# Allegro board HDMI-RK628 GSV2011-A01.brd
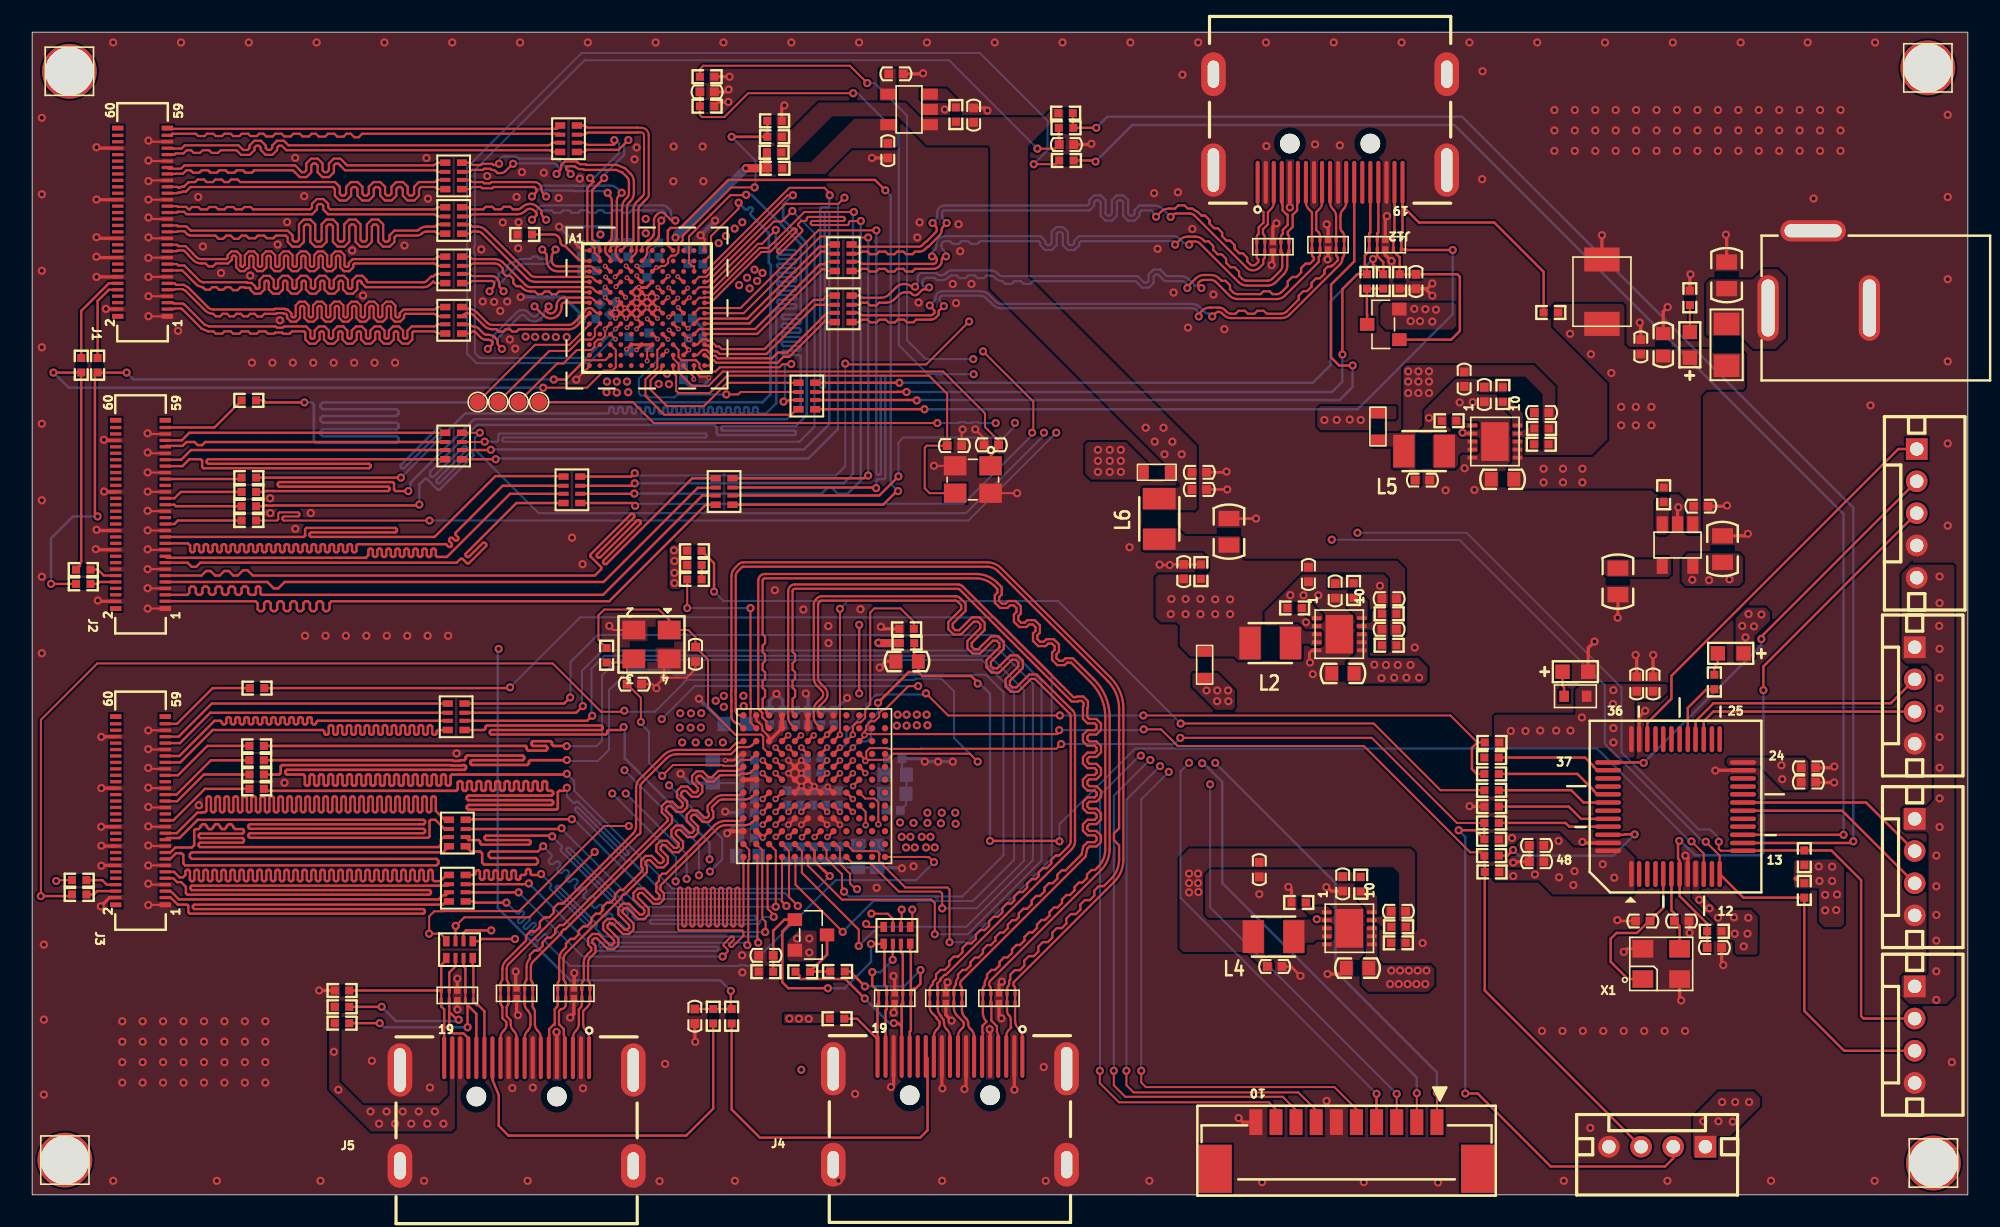
[diagram p0: board, top side]
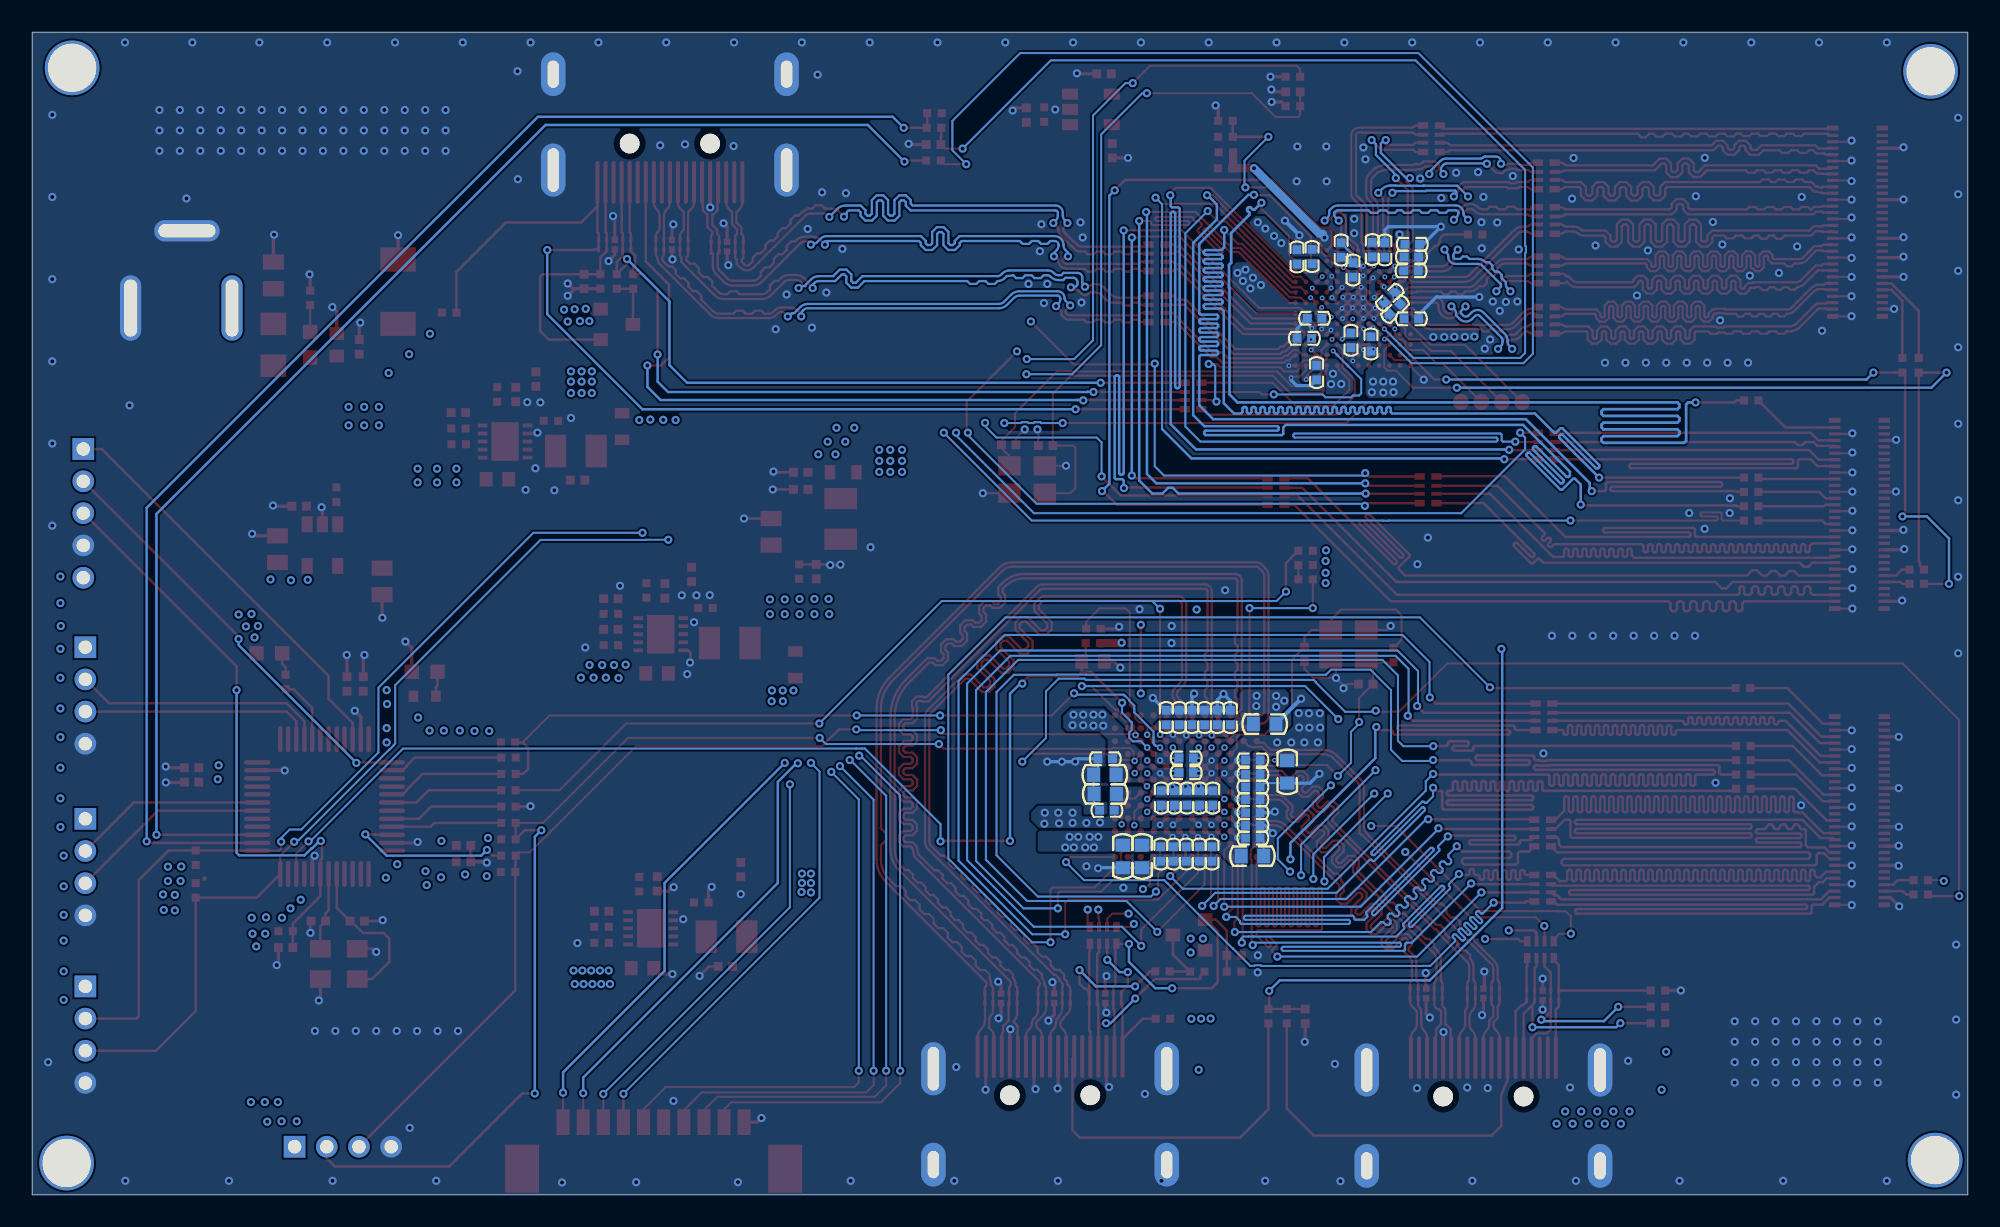
[diagram p1: board, bottom side, seen from below]

Outline 120.27 x 72.26 mm; copper layers: TOP, GND, POWER, BOTTOM. Coordinates in mm from the lower left corner of the outline.
Outline path: 0,72.26 0,0 120.27,0 120.27,72.26 0,72.26

## Design rules (mm)
net group BT1120/LCDC_D0: nets BT1120/D0 BT1120/LCDC_D0
net group BT1120/LCDC_D1: nets BT1120/D1 BT1120/LCDC_D1
net group BT1120/LCDC_D2: nets BT1120/D2 BT1120/LCDC_D2
net group BT1120/LCDC_D3: nets BT1120/D3 BT1120/LCDC_D3
net group BT1120/LCDC_D4: nets BT1120/D4 BT1120/LCDC_D4
net group BT1120/LCDC_D5: nets BT1120/D5 BT1120/LCDC_D5
net group BT1120/LCDC_D6: nets BT1120/D6 BT1120/LCDC_D6
net group BT1120/LCDC_D7: nets BT1120/D7 BT1120/LCDC_D7
net group BT1120/LCDC_D8: nets BT1120/D8 BT1120/LCDC_D8
net group BT1120/LCDC_D9: nets BT1120/D9 BT1120/LCDC_D9
net group BT1120/LCDC_D10: nets BT1120/D10 BT1120/LCDC_D10
net group BT1120/LCDC_D11: nets BT1120/D11 BT1120/LCDC_D11
net group BT1120/LCDC_D12: nets BT1120/D12 BT1120/LCDC_D12
net group BT1120/LCDC_D13: nets BT1120/D13 BT1120/LCDC_D13
net group BT1120/LCDC_D14: nets BT1120/D14 BT1120/LCDC_D14
net group BT1120/LCDC_D15: nets BT1120/D15 BT1120/LCDC_D15
net group BT1120/LCDC_DCLK: nets BT1120/DCLK BT1120/LCDC_DCLK
net group BT1120_D0: nets BT1120_D0 BT1120D0
net group BT1120_D1: nets BT1120_D1 BT1120D1
net group BT1120_D2: nets BT1120_D2 BT1120D2
net group BT1120_D3: nets BT1120_D3 BT1120D3
net group BT1120_D4: nets BT1120_D4 BT1120D4
net group BT1120_D5: nets BT1120_D5 BT1120D5
net group BT1120_D6: nets BT1120_D6 BT1120D6
net group BT1120_D7: nets BT1120_D7 BT1120D7
net group BT1120_D8: nets BT1120_D8 BT1120D8
net group BT1120_D9: nets BT1120_D9 BT1120D9
net group BT1120_D10: nets BT1120_D10 BT1120D10
net group BT1120_D11: nets BT1120_D11 BT1120D11
net group BT1120_D12: nets BT1120_D12 BT1120D12
net group BT1120_D13: nets BT1120_D13 BT1120D13
net group BT1120_D14: nets BT1120_D14 BT1120D14
net group BT1120_D15: nets BT1120_D15 BT1120D15
net group BT1120_DCLK: nets BT1120_DCLK BT1120DCLK
net group HDMIRX_CLKN: nets HDMI_RXCLKN HDMIRX_CLKN
net group HDMIRX_CLKP: nets HDMI_RXCLKP HDMIRX_CLKP
net group HDMIRXD0N: nets HDMIRX_D0N HDMIRXD0N
net group HDMIRXD0P: nets HDMIRX_D0P HDMIRXD0P
net group HDMIRXD1N: nets HDMIRX_D1N HDMIRXD1N
net group HDMIRXD1P: nets HDMIRX_D1P HDMIRXD1P
net group HDMIRXD2N: nets HDMIRX_D2N HDMIRXD2N
net group HDMIRXD2P: nets HDMIRX_D2P HDMIRXD2P
net group RK628D_G0/L1/M1_D0N: nets M1_D0N RK628D_G0/L1/M1_D0N
net group RK628D_G0/L1/M1_D0P: nets M1_D0P RK628D_G0/L1/M1_D0P
net group RK628D_G1/L1/M1_D1N: nets M1_D1N RK628D_G1/L1/M1_D1N
net group RK628D_G1/L1/M1_D1P: nets M1_D1P RK628D_G1/L1/M1_D1P
net group RK628D_G2/L1/M1_D2N: nets M1_D2N RK628D_G2/L1/M1_D2N
net group RK628D_G2/L1/M1_D2P: nets M1_D2P RK628D_G2/L1/M1_D2P
net group RK628D_G3/L1/M1_D3N: nets M1_D3N RK628D_G3/L1/M1_D3N
net group RK628D_G3/L1/M1_D3P: nets M1_D3P RK628D_G3/L1/M1_D3P
net group RK628D_G4/L2/M2_D0N: nets M2_D0N RK628D_G4/L2/M2_D0N
net group RK628D_G4/L2/M2_D0P: nets M2_D0P RK628D_G4/L2/M2_D0P
net group RK628D_G5/L2/M2_D1N: nets M2_D1N RK628D_G5/L2/M2_D1N
net group RK628D_G5/L2/M2_D1P: nets M2_D1P RK628D_G5/L2/M2_D1P
net group RK628D_G6/L2/M2_D2N: nets M2_D2N RK628D_G6/L2/M2_D2N
net group RK628D_G6/L2/M2_D2P: nets M2_D2P RK628D_G6/L2/M2_D2P
net group RK628D_G7/L2/M2_D3N: nets M2_D3N RK628D_G7/L2/M2_D3N
net group RK628D_G7/L2/M2_D3P: nets M2_D3P RK628D_G7/L2/M2_D3P
net group RK628D_L1/M1_CLKN: nets M1_CLKN RK628D_L1/M1_CLKN
net group RK628D_L1/M1_CLKP: nets M1_CLKP RK628D_L1/M1_CLKP
net group RK628D_L2/M2_CLKN: nets M2_CLKN RK628D_L2/M2_CLKN
net group RK628D_L2/M2_CLKP: nets M2_CLKP RK628D_L2/M2_CLKP
net group RX: nets RXA0_N RXA0_P RXA1_N RXA1_P RXA2_N RXA2_P RXAC_N RXAC_P
net group TX: nets TXA0_N TXA0_P TXA1_N TXA1_P TXA2_N TXA2_P TXAC_N TXAC_P

## Placement (name value [footprint] x y rotation side)
C1  10uF  [C0402]  45.59 14.88 180 top
C2  18pF  [C0402]  37.41 31.74 0 top
C3  18pF  [C0402]  41.21 33.6 270 top
C4  4.7uF  [C0603]  54.36 33.15 180 top
C5  47uF  [C0805]  105.28 57.15 90 top
C6  10uF  [C0603]  101.35 52.83 90 top
C7  0.1UF  [C0402]  99.95 52.7 90 top
C8  10uF  [C0603]  51.31 21.03 270 bottom
C9  0.1uF  [C0402]  47.75 21.18 270 bottom
C10  0.1uF  [C0402]  46.96 21.18 270 bottom
C11  0.1uF  [C0402]  48.56 21.18 270 bottom
C12  0.1uF  [C0402]  49.35 21.18 90 bottom
C13  0.1uF  [C0402]  50.14 21.18 270 bottom
C14  10uF  [C0603]  44.45 21.06 180 bottom
C15  0.1uF  [C0402]  48.56 27.15 180 bottom
C16  0.1uF  [C0402]  49.81 29.67 90 bottom
C17  10uF  [C0603]  43.69 29.26 180 bottom
C18  0.1uF  [C0402]  44.42 23.75 180 bottom
C19  0.1uF  [C0402]  44.42 22.96 180 bottom
C20  0.1uF  [C0402]  44.42 22.17 180 bottom
C21  0.1uF  [C0402]  45.82 29.67 90 bottom
C22  10uF  [C0603]  52.5 21.03 270 bottom
C23  0.1uF  [C0402]  49 29.67 90 bottom
C24  0.1uF  [C0402]  48.21 29.67 90 bottom
C25  0.1uF  [C0402]  47.42 29.67 90 bottom
C26  0.1uF  [C0402]  46.63 29.67 90 bottom
C27  10uF  [C0603]  42.29 26.29 270 bottom
C28  0.1uF  [C0402]  44.42 24.56 180 bottom
C29  0.1uF  [C0402]  44.42 25.35 180 bottom
C30  10uF  [C0603]  53.62 26.11 0 bottom
C31  0.1uF  [C0402]  53.59 27.1 0 bottom
C32  0.1uF  [C0402]  48.56 26.24 180 bottom
C33  0.1uF  [C0402]  44.42 27.03 180 bottom
C34  0.1uF  [C0402]  44.42 26.14 180 bottom
C35  10uF  [C0603]  53.59 24.92 0 bottom
C36  1uF  [C0402]  53.49 23.9 0 bottom
C37  1uF  [C0402]  50.11 24.66 90 bottom
C38  0.1uF  [C0402]  49.3 24.66 90 bottom
C39  0.1uF  [C0402]  48.51 24.66 90 bottom
C40  0.1uF  [C0402]  47.73 24.66 90 bottom
C41  0.1uF  [C0402]  46.91 24.66 90 bottom
C42  22uF  [C0603]  81.44 32.41 180 top
C43  22pF  [C0402]  84.31 35.15 180 top
C44  4000pF  [C0402]  80.96 37.54 270 top
C45  22uF  [C0402]  84.31 37.05 0 top
C53  22pF  [C0402]  84.89 17.62 180 top
C54  4000pF  [C0402]  81.43 19.33 270 top
C55  22uF  [C0402]  77.2 14.19 180 top
C56  22uF  [C0603]  82.35 14.09 180 top
C57  1uF  [C0402]  103.68 42.8 0 top
C58  0.01uF  [C0805]  98.53 38.13 270 top
C59  1uF  [C0805]  105.03 40.13 90 top
C60  100NF  [C0402]  110.36 25.65 180 top
C61  100NF  [C0402]  110.36 26.54 180 top
C62  100NF  [C0402]  93.47 20.7 0 top
C63  100NF  [C0402]  93.47 21.72 0 top
C64  100NF  [C0402]  99.69 31.75 270 top
C65  100NF  [C0402]  100.71 31.75 270 top
C66  100NF  [C0402]  104.52 15.37 180 top
C67  18PF  [C0402]  100.08 17.02 0 top
C68  18PF  [C0402]  102.49 17.02 180 top
C69  100nF  [C0402]  64.26 65.28 180 top
C70  12pF  [C0402]  59.6 46.61 180 top
C71  12pF  [C0402]  57.3 46.57 180 top
C72  100nF  [C0402]  41.94 68.55 0 top
C73  100nF  [C0402]  40.74 58.32 90 bottom
C74  100nF  [C0402]  41.68 58.29 90 bottom
C75  100nF  [C0402]  37.08 52.88 270 bottom
C76  100nF  [C0402]  36.22 58.72 90 bottom
C77  100nF  [C0402]  40.46 51.1 270 bottom
C78  100nF  [C0402]  35.59 55.04 315 bottom
C79  100nF  [C0402]  38.33 53.11 270 bottom
C80  100nF  [C0402]  35.92 55.78 315 bottom
C81  1uF  [C0402]  40.59 54.48 0 bottom
C82  100nF  [C0402]  41.22 53.24 0 bottom
C83  1uF  [C0402]  34.59 57.43 180 bottom
C84  100nF  [C0402]  34.57 58.29 180 bottom
C85  100nF  [C0402]  34.52 59.08 180 bottom
C86  100nF  [C0402]  37.01 58.75 90 bottom
C87  1uF  [C0402]  34.57 54.45 180 bottom
C88  100nF  [C0402]  38.2 57.48 90 bottom
C89  1uF  [C0402]  38.94 58.72 90 bottom
C90  10uF  [C0805]  74.36 41.21 90 top
C91  100nF  [C0402]  71.55 38.73 90 top
C92  4.7uF  [C0402]  72.52 43.84 0 top
C93  100nF  [C0402]  72.52 44.91 0 top
C94  22pF  [C0402]  93.79 48.62 180 top
C95  4000pF  [C0402]  90.22 49.74 270 top
C96  22uF  [C0402]  86.38 44.42 180 top
C97  22uF  [C0603]  91.36 44.47 180 top
C98  1uF  [C0402]  58.5 67.11 90 top
C99  1uF  [C0402]  53.16 64.9 270 top
C100  0.01uF  [C0402]  53.67 69.67 0 top
C101  10uF  [C0402]  85.98 56.77 270 top
C102  22uF  [C0402]  79.3 38.56 90 top
C103  22uF  [C0402]  76.24 20.21 90 top
C104  22uF  [C0402]  88.98 50.7 90 top
D1  BAT54C  [SOT23]  48.39 16.15 270 top
D2  SMBJ28CA  [DO-214AA]  97.54 56.13 270 top
D5  BAT54C  [SOT23]  83.95 54.1 90 top
ESD1  Rclamp0524  [DFN2510]  60.07 12.22 180 top
ESD2  Rclamp0524  [DFN2510]  33.65 12.52 180 top
ESD3  Rclamp0524  [DFN2510]  56.77 12.22 180 top
ESD4  Rclamp0524  [DFN2510]  30.1 12.52 180 top
ESD5  AVLC18S02015  [C0402]  41.17 11.1 270 top
ESD6  Rclamp0524  [DFN2510]  53.59 12.22 180 top
ESD7  Rclamp0524  [DFN2510]  26.42 12.4 180 top
ESD8  Rclamp0524  [DFN2510]  77.09 58.93 0 top
ESD9  Rclamp0524  [DFN2510]  80.52 59.05 0 top
ESD10  Rclamp0524  [DFN2510]  84.07 59.05 0 top
J1  MIPI_60_CON_F  [DF40HC-60DS]  6.86 60.45 90 top
J2  MIPI_60_CON_F  [DF40HC-60DS]  6.73 42.29 90 top
J3  MIPI_60_CON_F  [DF40HC-60DS]  6.73 23.88 90 top
J4  HDMI_A  [MOLEX_47151]  57.02 4.09 0 top
J5  HDMI_A  [MOLEX_47151]  30.1 4.01 0 top
J6  ICP1  [PH-4P]  103.96 2.99 180 top
J7  ICP1  [PH-4P]  116.97 23.37 270 top
J8  -  [DC-005]  114.55 55.12 180 top
J9  ICP1  [PH-4P]  116.97 34.04 270 top
J10  -  [PH-5P]  117.09 46.35 270 top
J11  CON10  [JST125-10P]  81.03 4.52 180 top
J12  HDMI_A  [MOLEX_47151]  80.64 67.44 180 top
J13  ICP1  [PH-4P]  116.97 12.95 270 top
L1  2A FUSE  [R1206]  105.28 52.83 270 top
L2  2.2UH  [SL1008H]  76.93 34.29 180 top
L4  2.2UH  [SL1008H]  77.13 16.05 180 top
L5  2.2UH  [SL1008H]  86.49 46.23 180 top
L6  2.2UH  [SL1008H]  70.03 42.01 90 top
LB1  120R-100MHz  [L0603]  69.88 44.91 180 top
LB2  120R-100MHz  [L0603]  83.62 47.75 90 top
LB3  120R-100MHz  [L0603]  72.85 32.94 270 top
LED1  Led-G-0603  [LED0603]  105.54 33.65 180 top
LED2  Led-G-0603  [LED0603]  95.88 32.51 0 top
LED3  RED_LED  [LED0603]  103 52.83 90 top
M1  126Drill/236Pad  [M3]  118.13 1.98 0 top
M2  126Drill/236Pad  [M3]  117.79 70.05 0 top
M3  126Drill/236Pad  [M3]  2.31 69.83 0 top
M4  126Drill/236Pad  [M3]  2.03 2.16 0 top
R21  0  [R0402]  4.06 51.56 270 top
R22  0  [R0402]  3.05 51.56 270 top
R31  0  [R0402]  13.46 41.91 180 top
R32  0  [R0402]  13.46 42.8 180 top
R33  0  [R0402]  13.46 43.69 180 top
R34  0  [R0402]  13.46 44.58 180 top
R39  0  [R0402]  13.46 49.38 180 top
R40  0  [R0402]  3.17 37.97 180 top
R41  0  [R0402]  3.17 38.86 180 top
R50  0  [R0402]  13.95 25.23 180 top
R51  0  [R0402]  13.95 26.12 180 top
R52  0  [R0402]  13.95 27.01 180 top
R53  0  [R0402]  13.95 27.9 180 top
R58  0  [R0402]  13.97 31.5 180 top
R59  0  [R0402]  2.92 18.67 180 top
R60  0  [R0402]  2.92 19.56 180 top
R61  10K  [R0402]  45.59 13.87 0 top
R62  47K  [R0402]  47.88 13.87 0 top
R63  47K  [R0402]  50.04 13.88 180 top
R64  2K  [R0402]  19.25 11.68 180 top
R65  2K  [R0402]  19.25 10.67 180 top
R66  NC  [R0402]  43.46 11.1 270 top
R67  33R  [R0402]  42.32 11.1 270 top
R68  10K  [R0402]  19.25 12.7 180 top
R69  4.7K  [R0402]  90.68 22.1 0 top
R70  4.7K  [R0402]  90.7 20.07 0 top
R71  1M  [R0402]  35.69 33.54 90 top
R72  2k/NC  [R0402]  41.15 40.03 180 top
R73  10K  [R0402]  54.33 35.18 180 top
R74  4.7K  [R0402]  54.36 34.29 180 top
R75  200R  [R0402]  41.15 38.25 0 top
R76  200R  [R0402]  41.15 39.14 180 top
R77  2k  [R0402]  103 55.75 270 top
R78  332k  [R0402]  78.44 36.47 0 top
R79  75k  [R0402]  84.31 36.11 0 top
R80  24k  [R0402]  84.31 34.16 180 top
R81  10k  [R0402]  82.1 37.56 270 top
R86  11k  [R0402]  84.9 16.66 0 top
R87  22k  [R0402]  84.89 15.66 180 top
R88  10k  [R0402]  82.55 19.3 270 top
R89  332k  [R0402]  78.7 18.17 0 top
R90  0  [R0402]  101.37 43.51 90 top
R91  0R  [R0402]  90.68 27.18 180 top
R92  1K  [R0402]  104.52 31.88 90 top
R93  10K  [R0402]  104.52 16.38 180 top
R94  10K  [R0402]  90.68 24.13 180 top
R95  0R  [R0402]  90.68 21.08 180 top
R96  0R  [R0402]  90.68 23.11 180 top
R97  1K  [R0603]  95.88 30.99 180 top
R98  0R  [R0402]  90.68 25.15 180 top
R99  NC  [R0402]  90.68 26.16 180 top
R100  NC  [R0402]  90.7 28.12 0 top
R101  10K  [R0402]  46.13 65.76 180 top
R102  10K  [R0402]  46.13 66.75 180 top
R103  4.02K  [R0402]  30.61 59.69 180 top
R104  100R  [R0402]  41.94 67.67 0 top
R105  2K  [R0402]  41.94 69.49 0 top
R106  0R  [R0402]  46.15 63.8 180 top
R107  0R  [R0402]  46.1 64.8 180 top
R108  10K  [R0402]  72.62 38.73 90 top
R111  7.5k  [R0402]  93.78 47.63 0 top
R112  20k  [R0402]  93.77 46.65 180 top
R113  10k  [R0402]  91.38 49.74 270 top
R114  332k  [R0402]  88.04 48.11 0 top
R115  0  [R0402]  57.39 67.14 270 top
R116  47K  [R0402]  82.93 56.77 270 top
R117  47K  [R0402]  83.95 56.77 270 top
R118  10K  [R0402]  84.96 56.77 90 top
R132  4.7k  [R0402]  64.21 67.23 0 top
R133  0  [R0402]  64.24 66.32 180 top
R134  0  [R0402]  64.26 64.29 180 top
R135  4.7K  [R0402]  110.11 20.95 270 top
R136  4.7K  [R0402]  110.11 18.92 90 top
R138  1k  [R0402]  50.01 10.95 180 top
R139  1k  [R0402]  94.36 54.84 0 top
RP1  33R  [RP0402_8N]  53.73 16.13 0 top
RP2  33R  [RP0402_8N]  26.55 15.24 0 top
RP3  0R  [RP0402_8N]  42.99 43.71 90 top
RP4  0R  [RP0402_8N]  33.54 43.82 90 top
RP5  0R  [RP0402_8N]  26.19 46.54 90 top
RP6  0R  [RP0402_8N]  26.19 54.36 90 top
RP7  0R  [RP0402_8N]  26.19 57.49 90 top
RP8  0R  [RP0402_8N]  26.19 60.56 90 top
RP9  0R  [RP0402_8N]  33.32 65.64 90 top
RP10  0R  [RP0402_8N]  26.19 63.33 90 top
RP11  0R  [RP0402_8N]  26.42 19.06 90 top
RP12  0R  [RP0402_8N]  26.42 22.49 90 top
RP13  0R  [RP0402_8N]  26.34 29.71 90 top
RP14  0R  [RP0402_8N]  50.39 58.24 270 top
RP15  0R  [RP0402_8N]  50.39 55.07 270 top
RP16  0R  [RP0402_8N]  48.13 49.65 270 top
TP1  TP_1.0  [TP_1R00]  30.23 49.28 0 top
TP2  TP_1.0  [TP_1R00]  28.96 49.28 0 top
TP3  TP_1.0  [TP_1R00]  27.69 49.28 0 top
TP4  TP_1.0  [TP_1R00]  31.5 49.28 0 top
U1  GSV2011  [GSV_144BGA]  48.59 25.4 0 top
U2  SGM6010  [TDFN-3_3-10L]  81.21 34.84 90 top
U4  SGM6010  [TDFN-3_3-10L]  81.84 16.57 90 top
U5  SGM2202-3.3  [SOT-23-5]  102.23 40.39 180 top
U6  N32G432x8  [LQFP48]  102.11 24.13 0 top
U7  RK628D  [BGA144_8R00X8R00X1R15]  38.2 55.12 0 top
U8  SGM6010  [TDFN-3_3-10L]  90.89 46.82 90 top
U9  SGM2036-1.8  [SOT-23-5]  54.48 67.46 90 top
X1  3225_8M_10ppm  [XT3225]  101.22 14.35 0 top
Y1  27MHz  [XTAL4-3_2X2_5X0_7]  38.48 34.21 180 top
Y2  24MHz  [CRY4_3R20X2R50X0R80]  58.45 44.46 180 top

## Library data of the parts
C1-C3 C9-C13 C15 C16 C18-C21 C23-C26 C28 C29 C31-C34 C36-C41 = CAP NP: room: 2
C4 = C0603: room: 2
C5-C7 C42-C45 C53-C59 C102 C103 = C_0: room: 2
C8 C14 C17 C22 C27 C30 C35 = C: room: 2
C60-C68 = C-0603: room: 2
C69-C93 C101 = CAP NP: room: 3
C94-C100 C104 = C_0: room: 3
D1 = BAT54C: room: 2
D2 = DIODE_0: room: 2
D5 = BAT54C: room: 3
ESD1-ESD4 ESD6 ESD7 = RClamp0514M: room: 2
ESD5 = TRISIL_BIDIR: room: 2
ESD8-ESD10 = RClamp0514M: room: 3
J1-J3 = MIPI_60_CON_F: room: 1
J4 J5 = HDMI_A_1: room: 2
J6 J7 J9 J13 = CONN RCPT 5_0: room: 2
J8 = CONN_JACK_PWR: room: 2
J10 = CON5: room: 2
J11 = CON10: room: 2
J12 = HDMI_A_1: room: 3
L1 = INDUCTOR: room: 2
L2 L4 = L: room: 2
L5 L6 = L: room: 3
LB1-LB3 = BEAD: room: 3
LED1-LED3 = LED_0: room: 2
M1-M4 = MTH9_0: room: 2
R21 R22 R40 R41 R59 R60 = R: room: 1
R31-R34 R39 R50-R53 R58 = R: signal model: R_R0402_0_0; room: 1
R61-R76 R95 R96 R98-R100 R135 R136 R138 R139 = R: room: 2
R77-R81 R86-R90 R97 = R_2: room: 2
R91 R93 = RESISTOR: room: 2
R92 = Resistor: room: 2
R94 = R-0603: room: 2
R101-R108 R132 = RESISTOR: room: 3
R111-R115 = R_2: room: 3
R116-R118 R133 R134 = R: room: 3
RP1 RP2 RP16 = RPAK4_0: Tolerance: TOL; User Part Number: PART#; room: 2
RP3-RP15 = RPAK4_0: Tolerance: TOL; User Part Number: PART#; signal model: RPAK4_0_RP0402_8N_0R_0R; room: 2
TP1-TP4 = TP: room: 3
U1 = GSV2002S_BGA_0: room: 2
U2 U4 = SGM6010: room: 2
U5 = SGM2202-3_3: room: 2
U6 = STM32F103CBT7: room: 2
U7 = RK628G_25: room: 3
U8 = SGM6010: room: 3
U9 = SGM2036-1_8: room: 3
X1 = CRYSTAL_0: room: 2
Y1 = Crystal_1: room: 2
Y2 = CRYSTAL_4P: room: 3

## Footprints (pads in the part's own frame, mm; a bottom-side part is the same pattern mirrored in y, then rotated)
BGA144_8R00X8R00X1R15
  round 0.3 smd: A1(-3.575,3.575) A2(-2.925,3.575) A3(-2.275,3.575) A4(-1.625,3.575) A5(-0.975,3.575) A6(-0.325,3.575) A7(0.325,3.575) A8(0.975,3.575) A9(1.625,3.575) A10(2.275,3.575) A11(2.925,3.575) A12(3.575,3.575) B1(-3.575,2.925) B2(-2.925,2.925) B3(-2.275,2.925) B4(-1.625,2.925) B5(-0.975,2.925) B6(-0.325,2.925) B7(0.325,2.925) B8(0.975,2.925) B9(1.625,2.925) B10(2.275,2.925) B11(2.925,2.925) B12(3.575,2.925) C1(-3.575,2.275) C2(-2.925,2.275) C3(-2.275,2.275) C4(-1.625,2.275) C5(-0.975,2.275) C6(-0.325,2.275) C7(0.325,2.275) C8(0.975,2.275) C9(1.625,2.275) C10(2.275,2.275) C11(2.925,2.275) C12(3.575,2.275) D1(-3.575,1.625) D2(-2.925,1.625) D3(-2.275,1.625) D4(-1.625,1.625) D5(-0.975,1.625) D6(-0.325,1.625) D7(0.325,1.625) D8(0.975,1.625) D9(1.625,1.625) D10(2.275,1.625) D11(2.925,1.625) D12(3.575,1.625) E1(-3.575,0.975) E2(-2.925,0.975) E3(-2.275,0.975) E4(-1.625,0.975) E5(-0.975,0.975) E6(-0.325,0.975) E7(0.325,0.975) E8(0.975,0.975) E9(1.625,0.975) E10(2.275,0.975) E11(2.925,0.975) E12(3.575,0.975) F1(-3.575,0.325) F2(-2.925,0.325) F3(-2.275,0.325) F4(-1.625,0.325) F5(-0.975,0.325) F6(-0.325,0.325) F7(0.325,0.325) F8(0.975,0.325) F9(1.625,0.325) F10(2.275,0.325) F11(2.925,0.325) F12(3.575,0.325) G1(-3.575,-0.325) G2(-2.925,-0.325) G3(-2.275,-0.325) G4(-1.625,-0.325) G5(-0.975,-0.325) G6(-0.325,-0.325) G7(0.325,-0.325) G8(0.975,-0.325) G9(1.625,-0.325) G10(2.275,-0.325) G11(2.925,-0.325) G12(3.575,-0.325) H1(-3.575,-0.975) H2(-2.925,-0.975) H3(-2.275,-0.975) H4(-1.625,-0.975) H5(-0.975,-0.975) H6(-0.325,-0.975) H7(0.325,-0.975) H8(0.975,-0.975) H9(1.625,-0.975) H10(2.275,-0.975) H11(2.925,-0.975) H12(3.575,-0.975) J1(-3.575,-1.625) J2(-2.925,-1.625) J3(-2.275,-1.625) J4(-1.625,-1.625) J5(-0.975,-1.625) J6(-0.325,-1.625) J7(0.325,-1.625) J8(0.975,-1.625) J9(1.625,-1.625) J10(2.275,-1.625) J11(2.925,-1.625) J12(3.575,-1.625) K1(-3.575,-2.275) K2(-2.925,-2.275) K3(-2.275,-2.275) K4(-1.625,-2.275) K5(-0.975,-2.275) K6(-0.325,-2.275) K7(0.325,-2.275) K8(0.975,-2.275) K9(1.625,-2.275) K10(2.275,-2.275) K11(2.925,-2.275) K12(3.575,-2.275) L1(-3.575,-2.925) L2(-2.925,-2.925) L3(-2.275,-2.925) L4(-1.625,-2.925) L5(-0.975,-2.925) L6(-0.325,-2.925) L7(0.325,-2.925) L8(0.975,-2.925) L9(1.625,-2.925) L10(2.275,-2.925) L11(2.925,-2.925) L12(3.575,-2.925) M1(-3.575,-3.575) M2(-2.925,-3.575) M3(-2.275,-3.575) M4(-1.625,-3.575) M5(-0.975,-3.575) M6(-0.325,-3.575) M7(0.325,-3.575) M8(0.975,-3.575) M9(1.625,-3.575) M10(2.275,-3.575) M11(2.925,-3.575) M12(3.575,-3.575)
C0402
  rect 0.551x0.551 smd: 1(-0.45,0) 2(0.45,0)
C0603
  rect 0.8x0.899 smd: 1(-0.701,0) 2(0.701,0)
C0805
  rect 0.95x1.3 smd: 1(-0.826,0) 2(0.826,0)
CRY4_3R20X2R50X0R80
  rect 1.4x1.199 smd: 1(-1.1,-0.851) 2(1.1,-0.851) 3(1.1,0.851) 4(-1.1,0.851)
DC-005
  oval 1.321x4.064 hole 0.813x3.556: 1(6.7,0) 2(0.4,0)
  oval 4.064x1.321 hole 3.556x0.813: 3(3.9,-4.8)
DF40HC-60DS
  rect 0.305x0.711 smd: 1(-5.851,-1.54) 2(-5.851,1.54) 59(5.851,-1.54) 60(5.851,1.54)
  rect 0.203x0.711 smd: 3(-5.4,-1.54) 4(-5.4,1.54) 5(-5,-1.54) 6(-5,1.54) 7(-4.6,-1.54) 8(-4.6,1.54) 9(-4.2,-1.54) 10(-4.2,1.54) 11(-3.8,-1.54) 12(-3.8,1.54) 13(-3.4,-1.54) 14(-3.4,1.54) 15(-3,-1.54) 16(-3,1.54) 17(-2.6,-1.54) 18(-2.6,1.54) 19(-2.2,-1.54) 20(-2.2,1.54) 21(-1.8,-1.54) 22(-1.8,1.54) 23(-1.4,-1.54) 24(-1.4,1.54) 25(-1,-1.54) 26(-1,1.54) 27(-0.6,-1.54) 28(-0.6,1.54) 29(-0.2,-1.54) 30(-0.2,1.54) 31(0.2,-1.54) 32(0.2,1.54) 33(0.6,-1.54) 34(0.6,1.54) 35(1,-1.54) 36(1,1.54) 37(1.4,-1.54) 38(1.4,1.54) 39(1.8,-1.54) 40(1.8,1.54) 41(2.2,-1.54) 42(2.2,1.54) 43(2.6,-1.54) 44(2.6,1.54) 45(3,-1.54) 46(3,1.54) 47(3.4,-1.54) 48(3.4,1.54) 49(3.8,-1.54) 50(3.8,1.54) 51(4.2,-1.54) 52(4.2,1.54) 53(4.6,-1.54) 54(4.6,1.54) 55(5,-1.54) 56(5,1.54) 57(5.4,-1.54) 58(5.4,1.54)
DFN2510
  oval 0.2x0.4 smd: 1(-1,0.3) 2(-0.5,0.3) 4(0.5,0.3) 5(1,0.3) 6(1,-0.3) 7(0.5,-0.3) 9(-0.5,-0.3) 10(-1,-0.3)
  rect 0.4x0.4 smd: 3(0,0.3) 8(0,-0.3)
DO-214AA
  rect 1.5x2.2 smd: 1(-2,0) 2(2,0)
GSV_144BGA
  round 0.4 smd: A1(-4.4,4.4) A2(-3.6,4.4) A3(-2.8,4.4) A4(-2,4.4) A5(-1.2,4.4) A6(-0.4,4.4) A7(0.4,4.4) A8(1.2,4.4) A9(2,4.4) A10(2.8,4.4) A11(3.6,4.4) A12(4.4,4.4) B1(-4.4,3.6) B2(-3.6,3.6) B3(-2.8,3.6) B4(-2,3.6) B5(-1.2,3.6) B6(-0.4,3.6) B7(0.4,3.6) B8(1.2,3.6) B9(2,3.6) B10(2.8,3.6) B11(3.6,3.6) B12(4.4,3.6) C1(-4.4,2.8) C2(-3.6,2.8) C3(-2.8,2.8) C4(-2,2.8) C5(-1.2,2.8) C6(-0.4,2.8) C7(0.4,2.8) C8(1.2,2.8) C9(2,2.8) C10(2.8,2.8) C11(3.6,2.8) C12(4.4,2.8) D1(-4.4,2) D2(-3.6,2) D3(-2.8,2) D4(-2,2) D5(-1.2,2) D6(-0.4,2) D7(0.4,2) D8(1.2,2) D9(2,2) D10(2.8,2) D11(3.6,2) D12(4.4,2) E1(-4.4,1.2) E2(-3.6,1.2) E3(-2.8,1.2) E4(-2,1.2) E5(-1.2,1.2) E6(-0.4,1.2) E7(0.4,1.2) E8(1.2,1.2) E9(2,1.2) E10(2.8,1.2) E11(3.6,1.2) E12(4.4,1.2) F1(-4.4,0.4) F2(-3.6,0.4) F3(-2.8,0.4) F4(-2,0.4) F5(-1.2,0.4) F6(-0.4,0.4) F7(0.4,0.4) F8(1.2,0.4) F9(2,0.4) F10(2.8,0.4) F11(3.6,0.4) F12(4.4,0.4) G1(-4.4,-0.4) G2(-3.6,-0.4) G3(-2.8,-0.4) G4(-2,-0.4) G5(-1.2,-0.4) G6(-0.4,-0.4) G7(0.4,-0.4) G8(1.2,-0.4) G9(2,-0.4) G10(2.8,-0.4) G11(3.6,-0.4) G12(4.4,-0.4) H1(-4.4,-1.2) H2(-3.6,-1.2) H3(-2.8,-1.2) H4(-2,-1.2) H5(-1.2,-1.2) H6(-0.4,-1.2) H7(0.4,-1.2) H8(1.2,-1.2) H9(2,-1.2) H10(2.8,-1.2) H11(3.6,-1.2) H12(4.4,-1.2) J1(-4.4,-2) J2(-3.6,-2) J3(-2.8,-2) J4(-2,-2) J5(-1.2,-2) J6(-0.4,-2) J7(0.4,-2) J8(1.2,-2) J9(2,-2) J10(2.8,-2) J11(3.6,-2) J12(4.4,-2) K1(-4.4,-2.8) K2(-3.6,-2.8) K3(-2.8,-2.8) K4(-2,-2.8) K5(-1.2,-2.8) K6(-0.4,-2.8) K7(0.4,-2.8) K8(1.2,-2.8) K9(2,-2.8) K10(2.8,-2.8) K11(3.6,-2.8) K12(4.4,-2.8) L1(-4.4,-3.6) L2(-3.6,-3.6) L3(-2.8,-3.6) L4(-2,-3.6) L5(-1.2,-3.6) L6(-0.4,-3.6) L7(0.4,-3.6) L8(1.2,-3.6) L9(2,-3.6) L10(2.8,-3.6) L11(3.6,-3.6) L12(4.4,-3.6) M1(-4.4,-4.4) M2(-3.6,-4.4) M3(-2.8,-4.4) M4(-2,-4.4) M5(-1.2,-4.4) M6(-0.4,-4.4) M7(0.4,-4.4) M8(1.2,-4.4) M9(2,-4.4) M10(2.8,-4.4) M11(3.6,-4.4) M12(4.4,-4.4)
JST125-10P
  rect 2.108x2.997 smd: (-8.8,2.9) (7.55,2.9)
  rect 0.813x1.6 smd: 1(-6.25,0) 2(-5,0) 3(-3.75,0) 4(-2.5,0) 5(-1.25,0) 6(0,0) 7(1.25,0) 8(2.5,0) 9(3.75,0) 10(5,0)
L0603
  rect 0.65x0.9 smd: 1(-0.825,0) 2(0.825,0)
LED0603
  rect 0.899x0.899 smd: 1(-0.8,0) 2(0.8,0)
LQFP48
  oval 0.279x1.626 smd: 1(-2.743,-4.191) 2(-2.261,-4.191) 3(-1.753,-4.191) 4(-1.245,-4.191) 5(-0.762,-4.191) 6(-0.254,-4.191) 7(0.254,-4.191) 8(0.762,-4.191) 9(1.245,-4.191) 10(1.753,-4.191) 11(2.261,-4.191) 12(2.743,-4.191) 25(2.743,4.191) 26(2.261,4.191) 27(1.753,4.191) 28(1.245,4.191) 29(0.762,4.191) 30(0.254,4.191) 31(-0.254,4.191) 32(-0.762,4.191) 33(-1.245,4.191) 34(-1.753,4.191) 35(-2.261,4.191) 36(-2.743,4.191)
  oval 1.626x0.279 smd: 13(4.191,-2.743) 14(4.191,-2.261) 15(4.191,-1.753) 16(4.191,-1.245) 17(4.191,-0.762) 18(4.191,-0.254) 19(4.191,0.254) 20(4.191,0.762) 21(4.191,1.245) 22(4.191,1.753) 23(4.191,2.261) 24(4.191,2.743) 37(-4.191,2.743) 38(-4.191,2.261) 39(-4.191,1.753) 40(-4.191,1.245) 41(-4.191,0.762) 42(-4.191,0.254) 43(-4.191,-0.254) 44(-4.191,-0.762) 45(-4.191,-1.245) 46(-4.191,-1.753) 47(-4.191,-2.261) 48(-4.191,-2.743)
M3
  round 3.4 hole 3: 1(0,0)
MOLEX_47151
  round 1.219 hole 1.219 unplated: (-2.5,2.096) (2.5,2.096)
  oval 0.254x2.667 smd: 1(4.5,4.508) 2(4,4.508) 3(3.5,4.508) 4(3,4.508) 5(2.5,4.508) 6(2,4.508) 7(1.5,4.508) 8(1,4.508) 9(0.5,4.508) 10(0,4.508) 11(-0.5,4.508) 12(-1,4.508) 13(-1.5,4.508) 14(-2,4.508) 15(-2.5,4.508) 16(-3,4.508) 17(-3.5,4.508) 18(-4,4.508) 19(-4.5,4.508)
  oval 1.524x3.302 hole 0.711x2.718: 20(-7.25,3.746) 21(7.25,3.746)
  oval 1.524x2.718 hole 0.711x1.702: 22(-7.25,-2.214) 23(7.25,-2.214)
PH-4P
  rect 1.346x1.346 hole 0.838: 1(0,0)
  round 1.346 hole 0.838: 2(2,0) 3(4,0) 4(6,0)
PH-5P
  rect 1.346x1.346 hole 0.838: 1(0,0)
  round 1.346 hole 0.838: 2(2.007,0) 3(3.988,0) 4(5.994,0) 5(8.001,0)
R0402
  rect 0.5x0.5 smd: 1(-0.45,0) 2(0.45,0)
R0603
  rect 0.6x0.7 smd: 1(-0.7,0) 2(0.7,0)
R1206
  rect 1.4x1.6 smd: 1(-1.3,0) 2(1.3,0)
RP0402_8N
  rect 0.406x0.635 smd: 1(-0.823,-0.521) 4(0.823,-0.521) 5(0.823,0.521) 8(-0.823,0.521)
  rect 0.254x0.635 smd: 2(-0.249,-0.521) 3(0.249,-0.521) 6(0.249,0.521) 7(-0.249,0.521)
SL1008H
  rect 1.321x2.032 smd: 1(-1.26,0) 2(1.26,0)
SOT23
  rect 0.8x0.9 smd: 1(-0.95,-1) 2(0.95,-1) 3(0,1)
SOT-23-5
  rect 0.69x0.99 smd: 1(-0.95,-1.295) 2(0,-1.295) 3(0.95,-1.295) 4(0.95,1.295) 5(-0.95,1.295)
TDFN-3_3-10L
  rect 0.24x0.6 smd: 1(1,1.4) 2(0.5,1.4) 3(0,1.4) 4(-0.5,1.4) 5(-1,1.4) 6(-1,-1.4) 7(-0.5,-1.4) 8(0,-1.4) 9(0.5,-1.4) 10(1,-1.4)
  rect 2.4x1.7 smd: 11(0,0)
TP_1R00
  round 1.001 smd: 1(0,0)
XT3225
  rect 1.295x1.092 smd: 1(-1.143,-0.94) 2(1.143,-0.94) 3(1.143,0.94) 4(-1.143,0.94)
XTAL4-3_2X2_5X0_7
  rect 1.422x1.168 smd: 1(-1.1,-0.9) 2(1.1,-0.9) 3(1.1,0.9) 4(-1.1,0.9)

## Nets
GND: C1.2 C2.2 C3.2 C4.2 C5.2 C6.2 C7.2 C8.2 C9.2 C10.2 C11.2 C12.1 C13.2 C14.2 C15.2 C16.2 C17.2 C18.2 C19.2 C20.2 C21.2 C22.2 C23.2 C24.2 C25.2 C26.2 C27.2 C28.2 C29.2 C30.2 C31.2 C32.2 C33.2 C34.2 C35.2 C36.2 C37.2 C38.2 C39.2 C40.2 C41.2 C42.2 C44.2 C45.1 C54.2 C55.1 C56.2 C57.2 C58.2 C59.2 C60.1 C61.1 C62.1 C63.1 C64.1 C65.1 C66.1 C67.1 C68.1 C69.1 C70.2 C71.1 C72.2 C73.2 C74.2 C75.2 C76.2 C77.2 C78.2 C79.2 C80.2 C81.2 C82.2 C83.2 C84.2 C85.2 C86.2 C87.2 C88.2 C89.2 C90.2 C91.2 C92.2 C93.2 C95.2 C96.1 C97.2 C98.2 C99.2 C100.2 C101.2 C102.1 C103.1 C104.1 D2.1(A) ESD1.3 ESD1.8 ESD2.3 ESD2.8 ESD3.3 ESD3.8 ESD4.3 ESD4.8 ESD5.2 ESD6.3 ESD6.8 ESD7.3 ESD7.8 ESD8.3 ESD8.8 ESD9.3 ESD9.8 ESD10.3 ESD10.8 J1.1(P01) J1.4(P04) J1.7(P07) J1.13(P13) J1.14(P14) J1.19(P19) J1.20(P20) J1.25(P25) J1.26(P26) J1.31(P31) J1.37(P37) J1.38(P38) J1.43(P43) J1.49(P49) J1.54(P54) J1.55(P55) J2.1(P01) J2.4(P04) J2.7(P07) J2.13(P13) J2.14(P14) J2.19(P19) J2.20(P20) J2.25(P25) J2.26(P26) J2.31(P31) J2.37(P37) J2.38(P38) J2.43(P43) J2.49(P49) J2.54(P54) J2.55(P55) J3.1(P01) J3.4(P04) J3.7(P07) J3.13(P13) J3.14(P14) J3.19(P19) J3.20(P20) J3.25(P25) J3.26(P26) J3.31(P31) J3.37(P37) J3.38(P38) J3.43(P43) J3.49(P49) J3.54(P54) J3.55(P55) J4.2(D2_SHIELD) J4.5(D1_SHIELD) J4.8(D0_SHIELD) J4.11(DC_SHIELD) J4.17(GND) J4.20(SHELL#20) J4.21(SHELL#21) J4.22(SHELL#22) J4.23(SHELL#23) J5.2(D2_SHIELD) J5.5(D1_SHIELD) J5.8(D0_SHIELD) J5.11(DC_SHIELD) J5.17(GND) J5.20(SHELL#20) J5.21(SHELL#21) J5.22(SHELL#22) J5.23(SHELL#23) J6.4 J7.4 J8.2 J8.3 J9.4 J10.4 J11.6 J11.10 J12.2(D2_SHIELD) J12.5(D1_SHIELD) J12.8(D0_SHIELD) J12.11(DC_SHIELD) J12.17(GND) J12.20(SHELL#20) J12.21(SHELL#21) J12.22(SHELL#22) J12.23(SHELL#23) J13.4 LED2.2(CATHODE) R61.1 R68.2 R73.2 R77.1 R78.1 R80.1 R87.1 R89.1 R94.2 R102.1 R103.2 R104.2 R105.2 R108.2 R112.1 R114.1 R118.1 U1.A2(AVSS#A2) U1.A4(AVSS#A4) U1.A6(AVSS#A6) U1.A8(RX_PVSS) U1.B4(AVSS#B4) U1.B6(AVSS#B6) U1.C3(MPLL_PVSS) U1.D1(AVSS#D1) U1.E5(DVSS#E5) U1.E6(DVSS#E6) U1.F1(AVSS#F1) U1.F2(AVSS#F2) U1.F5(DVSS#F5) U1.F6(DVSS#F6) U1.G5(OVSS#G5) U1.G6(OVSS#G6) U1.G7(OVSS#G7) U1.G8(OVSS#G8) U1.H1(AVSS#H1) U1.H2(AVSS#H2) U1.J5(AVSS#J5) U1.J6(AVSS#J6) U1.J7(AVSS#J7) U1.J8(PAR_PVSS) U1.K1(TX_PVSS) U2.2(GND) U2.5(PGND) U2.11(GND2) U4.2(GND) U4.5(PGND) U4.11(GND2) U5.2(GND) U6.8(VSSA) U6.23(VSS_1) U6.35(VSS_2) U6.47(VSS_3) U7.A1(GND12) U7.A12(GND13) U7.C4(GND3) U7.C6(GND5) U7.D3(GND1) U7.D6(GND4) U7.D7(TEST_D) U7.E5(GND16) U7.E6(GND17) U7.E7(GND18) U7.F4(GND19) U7.F5(GND20) U7.F6(GND21) U7.F7(GND22) U7.G3(GND2) U7.G4(GND23) U7.G5(GND24) U7.G6(GND25) U7.G7(GND26) U7.G8(GND27) U7.H6(GND28) U7.H10(GND11) U7.K5(GND7) U7.K6(GND8) U7.K7(GND9) U7.K10(GND10) U7.L10(GND28) U7.M1(GND14) U7.M11(GND29) U7.M12(GND15) U8.2(GND) U8.5(PGND) U8.11(GND2) U9.2(GND) X1.2 X1.4 Y1.2 Y1.4 Y2.2(GND#2) Y2.4(GND#4)
AUD_D1: J11.2 U1.H9(AUD_D1)
AUD_D2: J11.3 U1.G10(AUD_D2)
AUD_D3: J11.4 U1.G9(AUD_D3)
AUD_D4: J11.5 U1.F10(AUD_D4)
AVMUTE: R99.2 R100.1 U1.D8(AVMUTE)
BOOT0: R94.1 U6.44(BOOT0)
BT1120/D0: J2.5(P05) RP3.7(R6)
BT1120/D1: J2.9(P09) RP3.6(R7)
BT1120/D2: J2.11(P11) RP3.5(R8)
BT1120/D3: J2.15(P15) RP4.8(R5)
BT1120/D4: J2.17(P17) RP4.7(R6)
BT1120/D5: J2.21(P21) RP4.6(R7)
BT1120/D6: J2.23(P23) RP4.5(R8)
BT1120/D7: J2.27(P27) R31.2
BT1120/D8: J2.41(P41) R34.2
BT1120/D9: J2.51(P51) RP5.6(R7)
BT1120/D10: J2.53(P53) RP5.5(R8)
BT1120/D11: J2.33(P33) R32.2
BT1120/D12: J2.35(P35) R33.2
BT1120/D13: J2.45(P45) RP5.8(R5)
BT1120/D14: J2.47(P47) RP5.7(R6)
BT1120/D15: J2.57(P57) R39.2
BT1120/DCLK: J2.3(P03) RP3.8(R5)
BT1120/LCDC_D0: RP3.2(R2) U7.G10(GPIO2_A0/VOP_D0_U)
BT1120/LCDC_D1: RP3.3(R3) U7.G11(GPIO2_A1/VOP_D1_U)
BT1120/LCDC_D2: RP3.4(R4) U7.G12(GPIO2_A2/VOP_D2_U)
BT1120/LCDC_D3: RP4.1(R1) U7.F9(GPIO2_A3/VOP_D3_U)
BT1120/LCDC_D4: RP4.2(R2) U7.F12(GPIO2_A4/VOP_D4_U)
BT1120/LCDC_D5: RP4.3(R3) U7.F11(GPIO2_A5/VOP_D5_U)
BT1120/LCDC_D6: RP4.4(R4) U7.F10(GPIO2_A6/VOP_D6_U)
BT1120/LCDC_D7: R31.1 U7.E10(GPIO2_A7/VOP_D7_U)
BT1120/LCDC_D8: R34.1 U7.E12(GPIO2_B0/VOP_D8_U)
BT1120/LCDC_D9: RP5.3(R3) U7.E11(GPIO2_B1/VOP_D9_U)
BT1120/LCDC_D10: RP5.4(R4) U7.D10(GPIO2_B2/VOP_D10_U)
BT1120/LCDC_D11: R32.1 U7.D11(GPIO2_B3/VOP_D11_U)
BT1120/LCDC_D12: R33.1 U7.C11(GPIO2_B4/VOP_D12_U)
BT1120/LCDC_D13: RP5.1(R1) U7.D12(GPIO2_B5/VOP_D13_U)
BT1120/LCDC_D14: RP5.2(R2) U7.C12(GPIO2_B6/VOP_D14_U)
BT1120/LCDC_D15: R39.1 U7.B12(GPIO2_B7/VOP_D15_U)
BT1120/LCDC_DCLK: RP3.1(R1) U7.A9(VOP_DCLK_U)
BT1120_D0: RP11.2(R2) U1.M1(TTL0_LVDS0P)
BT1120_D1: RP11.3(R3) U1.L1(TTL1_LVDS0N)
BT1120_D2: RP11.4(R4) U1.M2(TTL2_LVDS1P)
BT1120_D3: RP12.1(R1) U1.L2(TTL3_LVDS1N)
BT1120_D4: RP12.2(R2) U1.M3(TTL4_LVDS2P)
BT1120_D5: RP12.3(R3) U1.L3(TTL5_LVDS2N)
BT1120_D6: RP12.4(R4) U1.M4(TTL6_LVDS3P)
BT1120_D7: R50.1 U1.L4(TTL7_LVDS3N)
BT1120_D8: R53.1 U1.M5(TTL8_LVDS4P)
BT1120_D9: RP13.3(R3) U1.L5(TTL9_LVDS4N)
BT1120_D10: RP13.4(R4) U1.M6(TTL10_LVDS5P)
BT1120_D11: R51.1 U1.L6(TTL11_LVDS5N)
BT1120_D12: R52.1 U1.L7(TTL12_LVDS_VSN)
BT1120_D13: RP13.1(R1) U1.L8(TTL13_LVDS_HSN)
BT1120_D14: RP13.2(R2) U1.M9(TTL14)
BT1120_D15: R58.1 U1.L9(TTL15)
BT1120_DCLK: RP11.1(R1) U1.M12(TTL_VCLK_LVDSCP)
BT1120D0: J3.5(P05) RP11.7(R6)
BT1120D1: J3.9(P09) RP11.6(R7)
BT1120D2: J3.11(P11) RP11.5(R8)
BT1120D3: J3.15(P15) RP12.8(R5)
BT1120D4: J3.17(P17) RP12.7(R6)
BT1120D5: J3.21(P21) RP12.6(R7)
BT1120D6: J3.23(P23) RP12.5(R8)
BT1120D7: J3.27(P27) R50.2
BT1120D8: J3.41(P41) R53.2
BT1120D9: J3.51(P51) RP13.6(R7)
BT1120D10: J3.53(P53) RP13.5(R8)
BT1120D11: J3.33(P33) R51.2
BT1120D12: J3.35(P35) R52.2
BT1120D13: J3.45(P45) RP13.8(R5)
BT1120D14: J3.47(P47) RP13.7(R6)
BT1120D15: J3.57(P57) R58.2
BT1120DCLK: J3.3(P03) RP11.8(R5)
CEC: ESD5.1 R66.1 R67.1 U1.D7(CEC)
DC_3V3: C59.1 C60.2 C61.2 C62.2 C63.2 C64.2 C65.2 J6.1 J7.1 J9.1 J10.5 J13.1 LED1.1(ANODE) R69.2 R70.2 R93.1 R97.1(A) R100.2 R135.2 R136.2 U5.5(VOUT) U6.1(VBAT) U6.9(VDDA) U6.24(VDD_1) U6.36(VDD_2) U6.48(VDD_3)
DCDC_1V2: C8.1 C9.1 C10.1 C11.1 C12.2 C13.1 C14.1 C15.1 C16.1 C17.1 C18.1 C19.1 C20.1 C21.1 C22.1 C23.1 C24.1 C25.1 C26.1 C53.1 C55.2 C103.2 L4.2 R86.2 U1.B8(RX_PVDD) U1.C4(MPLL_PVDD) U1.C5(RX_AVDD#C5) U1.C6(RX_AVDD#C6) U1.C7(RX_AVDD#C7) U1.E7(DVDD#E7) U1.E8(DVDD#E8) U1.H3(TX_AVDD#H3) U1.J3(TX_AVDD#J3) U1.K2(TX_PVDD) U1.K3(TX_AVDD#K3) U1.K5(PAR_AVDD#K5) U1.K6(PAR_AVDD#K6) U1.K7(PAR_AVDD#K7) U1.K8(PAR_PVDD)
DCDC_3V3: C27.1 C28.1 C29.1 C30.1 C31.1 C32.1 C33.1 C34.1 C43.1 C45.2 C90.1 C91.1 C102.2 L2.2 L6.1 LB3.1 R72.2 R74.2 R76.2 R79.2 R108.1 U1.E3(TVDD#E3) U1.F3(TVDD#F3) U1.F4(TVDD#F4) U1.F7(DVDDIO#F7) U1.F8(DVDDIO#F8) U1.G3(TVDD#G3)
DCDC_3V3_A: C35.1 C36.1 C37.1 C38.1 C39.1 C40.1 C41.1 LB3.2 U1.H5(VDD1833#H5) U1.H6(VDD1833#H6) U1.H7(VDD1833#H7) U1.H8(VDD1833#H8)
DUT_RST: C4.1 R74.1 U1.D9(RESETB) U6.10(PA0/WKUP)
EX_UART_RX: J9.2 U6.28(PB15)
EX_UART_TX: J9.3 U6.27(PB14)
GVI_HPD: U7.A7(GPIO3_B1/GVI_HPD_U)
GVI_LOCK: U7.B7(GPIO3_B2/GVI_LOCK_U)
HDMI_5V: C6.1 C7.1 C42.1 C56.1 C57.1 C97.1 D1.2(A1) D2.2(K) D5.2(A1) J5.18(+5V) L1.2 LED3.1(ANODE) R64.2 R65.2 R90.2 R138.2 R139.2 U2.6(PVDD1) U2.7(PVDD2) U2.8(AVDD) U4.6(PVDD1) U4.7(PVDD2) U4.8(AVDD) U5.1(VIN) U8.6(PVDD1) U8.7(PVDD2) U8.8(AVDD)
HDMI_RX_5V: C101.1 D5.1(A2) ESD10.4 ESD10.7 J12.18(+5V) R118.2
HDMI_RX_SCL: ESD10.1 ESD10.10 J12.15(DDC CLK) R116.1 RP16.7(R6)
HDMI_RX_SDA: ESD10.2 ESD10.9 J12.16(DDC DATA) R117.1 RP16.8(R5)
HDMI_RXCEC: RP16.3(R3) U7.K9(GPIO1_B3/HDMIRX_CEC_M0_U)
HDMI_RXCLKN: RP15.3(R3) U7.L11(HDMIRX_CLKN)
HDMI_RXCLKP: RP15.4(R4) U7.L12(HDMIRX_CLKP)
HDMI_RXHPD: RP16.4(R4) U7.K8(GPIO1_B0/HDMIRX_HPD_M0_D)
HDMI_RXSCL: RP16.2(R2) U7.L8(GPIO1_B2/HDMIRX_SCL_M0_U)
HDMI_RXSDA: RP16.1(R1) U7.M8(GPIO1_B1/HDMIRX_SDA_M0_U)
HDMIRX_CEC: J12.13(CEC) RP16.6(R7)
HDMIRX_CLKN: ESD9.5 ESD9.6 J12.12(DC-) RP15.6(R7)
HDMIRX_CLKP: ESD9.4 ESD9.7 J12.10(DC+) RP15.5(R8)
HDMIRX_D0N: ESD9.2 ESD9.9 J12.9(D0-) RP15.8(R5)
HDMIRX_D0P: ESD9.1 ESD9.10 J12.7(D0+) RP15.7(R6)
HDMIRX_D1N: ESD8.5 ESD8.6 J12.6(D1-) RP14.6(R7)
HDMIRX_D1P: ESD8.4 ESD8.7 J12.4(D1+) RP14.5(R8)
HDMIRX_D2N: ESD8.2 ESD8.9 J12.3(D2-) RP14.8(R5)
HDMIRX_D2P: ESD8.1 ESD8.10 J12.1(D2+) RP14.7(R6)
HDMIRX_HPD: ESD10.5 ESD10.6 J12.19(HPD/HEAC-) R139.1 RP16.5(R8)
HDMIRXD0N: RP15.1(R1) U7.K11(HDMIRX_D0N)
HDMIRXD0P: RP15.2(R2) U7.K12(HDMIRX_D0P)
HDMIRXD1N: RP14.3(R3) U7.J11(HDMIRX_D1N)
HDMIRXD1P: RP14.4(R4) U7.J12(HDMIRX_D1P)
HDMIRXD2N: RP14.1(R1) U7.H11(HDMIRX_D2N)
HDMIRXD2P: RP14.2(R2) U7.H12(HDMIRX_D2P)
I2C0_SCL: J6.2 R59.2 R69.1 R96.2 U1.D10(I2C_SCL)
I2C0_SDA: J6.3 R60.2 R70.1 R95.2 U1.C10(I2C_SDA)
I2C1_SCL: J13.2 R21.2 R40.2 R135.1 U6.13(PA3) U7.L3(GPIO0_B4/I2C_SCL_U)
I2C1_SDA: J13.3 R22.2 R41.2 R136.1 U6.12(PA2) U7.K3(GPIO1_B5/I2C_SDA_U)
I2S_BCK: J11.8 U1.E10(AUD_SCLK)
I2S_MCLK: J11.9 U1.E9(AUD_MCLK)
I2S_SDRX: J11.1 U1.H10(AUD_D0)
I2S_WS: J11.7 U1.F9(AUD_D5)
INT: R72.1 R98.2 U1.C8(INT)
LCDC_DEN: U7.B9(GPIO3_A0/VOP_DEN_U)
LCDC_HSYNC: U7.A8(GPIO3_A1/VOP_HSYNC_U)
LCDC_VSYNC: U7.B8(GPIO3_A3/VOP_VSYNC_U)
M1_CLKN: J1.21(P21) RP7.6(R7)
M1_CLKP: J1.23(P23) RP7.5(R8)
M1_D0N: J1.9(P09) RP6.6(R7)
M1_D0P: J1.11(P11) RP6.5(R8)
M1_D1N: J1.3(P03) RP6.8(R5)
M1_D1P: J1.5(P05) RP6.7(R6)
M1_D2N: J1.27(P27) RP8.8(R5)
M1_D2P: J1.29(P29) RP8.7(R6)
M1_D3N: J1.15(P15) RP7.8(R5)
M1_D3P: J1.17(P17) RP7.7(R6)
M2_CLKN: J1.47(P47) RP10.5(R8)
M2_CLKP: J1.45(P45) RP10.6(R7)
M2_D0N: J1.53(P53) RP9.7(R6)
M2_D0P: J1.51(P51) RP9.8(R5)
M2_D1N: J1.41(P41) RP10.7(R6)
M2_D1P: J1.39(P39) RP10.8(R5)
M2_D2N: J1.59(P59) RP9.5(R8)
M2_D2P: J1.57(P57) RP9.6(R7)
M2_D3N: J1.35(P35) RP8.5(R8)
M2_D3P: J1.33(P33) RP8.6(R7)
OSC_IN: C67.2 U6.5(PD0/OSC_IN) X1.1
OSC_OUT: C68.2 U6.6(PD1/OSC_OUT) X1.3
RES: R91.2
RESET_MCU: C66.2 J10.3 R93.2 U6.7(NRST)
RK628D_EFUSE: C72.1 R104.1 U7.J8(EFUSE_VDD_2V5)
RK628D_G0/L1/M1_D0N: RP6.3(R3) U7.G1(GVI/LVDS/MIPI_TX0N)
RK628D_G0/L1/M1_D0P: RP6.4(R4) U7.G2(GVI/LVDS/MIPI_TX0P)
RK628D_G1/L1/M1_D1N: RP6.1(R1) U7.F1(GVI/LVDS/MIPI_TX1N)
RK628D_G1/L1/M1_D1P: RP6.2(R2) U7.F2(GVI/LVDS/MIPI_TX1P)
RK628D_G2/L1/M1_D2N: RP8.1(R1) U7.D1(GVI/LVDS/MIPI_TX3N)
RK628D_G2/L1/M1_D2P: RP8.2(R2) U7.D2(GVI/LVDS/MIPI_TX3P)
RK628D_G3/L1/M1_D3N: RP7.1(R1) U7.C1(GVI/LVDS/MIPI_TX4N)
RK628D_G3/L1/M1_D3P: RP7.2(R2) U7.C2(GVI/LVDS/MIPI_TX4P)
RK628D_G4/L2/M2_D0N: RP9.2(R2) U7.B2(GVI/LVDS/MIPI_TX5N)
RK628D_G4/L2/M2_D0P: RP9.1(R1) U7.A2(GVI/LVDS/MIPI_TX5P)
RK628D_G5/L2/M2_D1N: RP10.2(R2) U7.B3(GVI/LVDS/MIPI_TX6N)
RK628D_G5/L2/M2_D1P: RP10.1(R1) U7.A3(GVI/LVDS/MIPI_TX6P)
RK628D_G6/L2/M2_D2N: RP9.4(R4) U7.B5(GVI/LVDS/MIPI_TX8N)
RK628D_G6/L2/M2_D2P: RP9.3(R3) U7.A5(GVI/LVDS/MIPI_TX8P)
RK628D_G7/L2/M2_D3N: RP8.4(R4) U7.B6(GVI/LVDS/MIPI_TX9N)
RK628D_G7/L2/M2_D3P: RP8.3(R3) U7.A6(GVI/LVDS/MIPI_TX9P)
RK628D_I2CSEL: R101.2 R102.2 U7.C7(GPIO3_B3_D)
RK628D_INT_H: R134.1 U6.15(PA5)
RK628D_L1/M1_CLKN: RP7.3(R3) U7.E1(GVI/LVDS/MIPI_TX2N)
RK628D_L1/M1_CLKP: RP7.4(R4) U7.E2(GVI/LVDS/MIPI_TX2P)
RK628D_L2/M2_CLKN: RP10.4(R4) U7.B4(GVI/LVDS/MIPI_TX7N)
RK628D_L2/M2_CLKP: RP10.3(R3) U7.A4(GVI/LVDS/MIPI_TX7P)
RK628D_OSCIN: C71.2 U7.M9(OSC_IN) Y2.3(X2)
RK628D_OSCOUT: C70.1 U7.L9(OSC_OUT) Y2.1(X1)
RK628D_RESET_H: R132.2 R133.1 U6.14(PA4)
RK628D_VCC_AVDD_1V1: C76.1 C78.1 C79.1 C80.1 C81.1 C86.1 C87.1 LB2.2 U7.C5(GVI/LVDS/MIPI_AVDD_1V1_3) U7.D4(GVI/LVDS/MIPI_AVDD_1V1_1) U7.E3(GVI/LVDS/MIPI_AVDD_1V1_2) U7.F3(GVI/LVDS/MIPI_AVDD_1V1_4) U7.H9(HDMIRX_DVDD_1V1_1) U7.J7(PLL_AVDD_1V1) U7.J9(HDMIRX_DVDD_1V1_2)
RK628D_VCC_AVDD_3V3: C77.1 C82.1 C83.1 C84.1 C85.1 LB1.2 U7.C3(GVI/LVDS/MIPI_PLL_AVDD_3V3) U7.D5(GVI/LVDS/MIPI_AVDD_3V3_1) U7.E4(GVI/LVDS/MIPI_AVDD_3V3_2) U7.J10(HDMIRX_AVDD_3V3) U7.M10(PLL_AVDD_3V3)
RK628D_VCC_DVDD_1V1: C73.1 C74.1 C94.1 C96.2 C104.2 L5.2 LB2.1 R111.2 U7.D8(DVDD_2) U7.E9(DVDD_1)
RK628D_VCC_IO_1V8: C99.1 R106.1 U9.5(OUT)
RK628D_VCC_IO_3V3: C75.1 C92.1 C93.1 C98.1 L6.2 LB1.1 R101.1 R107.1 R115.2 R132.1 U7.H5(VCCIO1) U9.1(IN)
RK628D_VCCIO_LCD: C88.1 C89.1 R106.2 R107.2 U7.E8(VCCIO2_1) U7.F8(VCCIO2_2)
RXA0_N: ESD3.2 ESD3.9 J4.9(D0-) U1.A5(RX_0N)
RXA0_P: ESD3.1 ESD3.10 J4.7(D0+) U1.B5(RX_0P)
RXA1_N: ESD1.5 ESD1.6 J4.6(D1-) U1.A3(RX_1N)
RXA1_P: ESD1.4 ESD1.7 J4.4(D1+) U1.B3(RX_1P)
RXA2_N: ESD1.2 ESD1.9 J4.3(D2-) U1.A1(RX_2N)
RXA2_P: ESD1.1 ESD1.10 J4.1(D2+) U1.B1(RX_2P)
RXA5V: RP1.8(R5) U1.E4(RX_5V)
RXA_5V: C1.1 D1.1(A2) ESD6.4 ESD6.7 J4.18(+5V) R61.2 RP1.1(R1)
RXA_CEC: J4.13(CEC) R66.2
RXA_HPD: ESD6.5 ESD6.6 J4.19(HPD/HEAC-) R138.1 RP1.2(R2)
RXA_SCL: ESD6.1 ESD6.10 J4.15(DDC CLK) R63.1 RP1.4(R4)
RXA_SDA: ESD6.2 ESD6.9 J4.16(DDC DATA) R62.1 RP1.3(R3)
RXAC_N: ESD3.5 ESD3.6 J4.12(DC-) U1.A7(RX_CN)
RXAC_P: ESD3.4 ESD3.7 J4.10(DC+) U1.B7(RX_CP)
RXAHPD: RP1.7(R6) U1.D6(RX_HPD)
RXASCL: RP1.5(R8) U1.D4(RX_SCL)
RXASDA: RP1.6(R7) U1.D5(RX_SDA)
SW_CLK: J10.2 U6.37(PA14)
SW_DIO: J10.1 U6.34(PA13)
TX_I2S_D0: U7.K2(GPIO0_A4/I2S_D0_M0_D)
TX_I2S_LRCK: U7.J1(GPIO0_A3/I2S_LRCK_M0_D)
TX_I2S_SCLK: U7.J2(GPIO0_A2/I2S_SCK_M0_D)
TXA0_N: ESD4.2 ESD4.9 J5.9(D0-) U1.E1(TX_0N)
TXA0_P: ESD4.1 ESD4.10 J5.7(D0+) U1.E2(TX_0P)
TXA1_N: ESD2.5 ESD2.6 J5.6(D1-) U1.G1(TX_1N)
TXA1_P: ESD2.4 ESD2.7 J5.4(D1+) U1.G2(TX_1P)
TXA2_N: ESD2.2 ESD2.9 J5.3(D2-) U1.J1(TX_2N)
TXA2_P: ESD2.1 ESD2.10 J5.1(D2+) U1.J2(TX_2P)
TXA_CEC: J5.13(CEC) R67.2
TXA_HPD: ESD7.5 ESD7.6 J5.19(HPD/HEAC-) R68.1 RP2.1(R1)
TXA_SCL: ESD7.2 ESD7.9 J5.15(DDC CLK) R65.1 RP2.3(R3)
TXA_SDA: ESD7.4 ESD7.7 J5.16(DDC DATA) R64.1 RP2.2(R2)
TXA_UTILITY: ESD7.1 ESD7.10 J5.14(UTIL/HEAC+) RP2.4(R4)
TXAC_N: ESD4.5 ESD4.6 J5.12(DC-) U1.C1(TX_CN)
TXAC_P: ESD4.4 ESD4.7 J5.10(DC+) U1.C2(TX_CP)
TXAHPD: RP2.8(R5) U1.G4(TX_HPD)
TXASCL: RP2.6(R7) U1.J4(TX_SCL)
TXASDA: RP2.7(R6) U1.H4(TX_SDA)
TXAUTILITY: RP2.5(R8) U1.K4(TX_UTILITY)
UART_RXD: J7.2 U6.19(PB1)
UART_TXD: J7.3 U6.18(PB0)
XTALI: C2.1 R71.1 U1.D2(XTALI) Y1.3
XTALO: C3.1 R71.2 U1.D3(XTALO) Y1.1
N773054: D1.3(K) R62.2 R63.2
N783484: C5.1 J8.1 L1.1
N805709: R73.1 U1.C9(CSB)
N805797: R75.1 U1.B2(REXT400)
N805817: R75.2 R76.1
N14731801: L4.1 U4.3(SW1) U4.4(SW2)
N14731855: C53.2 R86.1 R87.2 U4.9(FB)
N14731867: R88.2 U4.10(COMP)
N14731973: C54.1 R88.1
N14756554: L5.1 U8.3(SW1) U8.4(SW2)
N14756608: C94.2 R111.1 R112.2 U8.9(FB)
N14756620: R113.2 U8.10(COMP)
N14756726: C95.1 R113.1
N14760168: C100.1 U9.4(BP)
N14761021: R115.1 U9.3(EN)
N14798763: J1.10(P10) R21.1
N14798815: J1.12(P12) R22.1
N14799821: J2.10(P10) R40.1
N14799831: J2.12(P12) R41.1
N14800775: J3.6(P06) R59.1
N14800852: J3.8(P08) R60.1
N14813535: D5.3(K) R116.2 R117.2
N14826938: R91.1 U6.38(PA15)
N14826948: U6.39(PB3)
N14826952: U6.20(PB2)
N14827514: R98.1 U6.42(PB6)
N14827522: U6.43(PB7)
N14827578: LED1.2(CATHODE) R92.2
N14827582: R92.1 U6.29(PA8)
N14827828: U6.25(PB12)
N14827844: R96.1 U6.45(PB8)
N14827848: R95.1 U6.46(PB9)
N14834909: U6.16(PA6)
N14836125: LED2.1(ANODE) R97.2(B)
N14836816: R99.1 U6.41(PB5)
N14848685: R134.2 U7.J3(GPIO3_B4/INT_D)
N14848689: C69.2 R133.2 U7.H4(RESETN_U)
N14877677: R114.2 U8.1(E\N\/RT)
N14880547: R89.2 U4.1(E\N\/RT)
N14960467: R90.1 U5.3(EN)
N14960507: C58.1 U5.4(BP)
N14962982: L2.1 U2.3(SW1) U2.4(SW2)
N14963036: C43.2 R79.1 R80.2 U2.9(FB)
N14963048: R81.2 U2.10(COMP)
N14963154: C44.1 R81.1
N14963248: R78.2 U2.1(E\N\/RT)
N61597252: R105.1 U7.G9(HDMIRX_EXTR)
N62306814: R103.1 U7.B1(GVI/LVDS/MIPI_REXT)
N62618127: TP1.1 U7.H3(GPIO0_A5/I2S_D1_M0_D)
N62618129: TP2.1 U7.H2(GPIO0_A6/I2S_D2_M0_D)
N62618131: TP3.1 U7.H1(GPIO0_A7/I2S_D3_M0_D)
N146309951: LED3.2(CATHODE) R77.2
N146600620: TP4.1 U7.H7(GPIO1_A0/TEST_CLKO_D)

Pads without a net: J1 2 6 8 16 18 22 24 28 30 32 34 36 40 42 44 46 48 50 52 56 58 60; J2 2 6 8 16 18 22 24 28 29 30 32 34 36 39 40 42 44 46 48 50 52 56 58 59 60; J3 2 10 12 16 18 22 24 28 29 30 32 34 36 39 40 42 44 46 48 50 52 56 58 59 60; J4 14; J12 14; M1 1; M2 1; M3 1; M4 1; U1 A9 A10 A11 A12 B9 B10 B11 B12 C11 C12 D11 D12 E11 E12 F11 F12 G11 G12 H11 H12 J9 J10 J11 J12 K9 K10 K11 K12 L10 L11 L12 M7 M8 M10 M11; U6 2 3 4 11 17 21 22 26 30 31 32 33 40; U7 A10 A11 B10 B11 C8 C9 C10 D9 H8 J4 J5 J6 K1 K4 L1 L2 L4 L5 L6 L7 M2 M3 M4 M5 M6 M7

## Via types
v1: diameter 0.305, hole 0.152, TOP to BOTTOM, 57 vias
v2: diameter 0.508, hole 0.254, TOP to BOTTOM, 893 vias
v3: diameter 0.406, hole 0.203, TOP to BOTTOM, 57 vias

## Routing (per net, layer and track width the routed paths; a pad name or vN(x,y) marks a point on that pad's centre or on a via; arc(x,y) is an arc through that point)
GND: length 272.4
  TOP w0.127: v2(7.22,61.85) 7.23,61.85 J1.37 ; v1(43.07,27.01) 43.63,27.01 44.02,27.4 U1.D1 ; J2.7 7.19,37.69 v2(7.18,37.7) ; J2.43 7.18,44.89 v2(7.18,44.9) ; J2.31 7.2,42.49 v2(7.18,42.52) ; v1(38.21,51.83) 38.21,52.53 U7.K7 ; J1.19 7.24,58.25 v2(7.22,58.23) ; J2.55 7.22,47.29 v2(7.18,47.33) ; v1(40.76,53.85) 40.7,53.85 40.69,53.87 40.69,53.9 40.48,54.11 U7.H10 ; C71.1 57.75,47.51 v2(57.81,47.57) ; v2(7.18,43.71) 7.19,43.69 J2.37 ; v2(7.22,54.61) 7.23,54.6 J1.1 ; v2(7.21,27.7) 7.24,27.68 J3.49 ; v2(7.21,24.1) 7.24,24.08 J3.31 ; J3.25 7.24,22.88 v2(7.21,22.9) ; v2(7.21,25.31) 7.24,25.28 J3.37 ; v2(7.18,46.14) 7.22,46.09 J2.49 ; J1.25 7.28,59.45 v2(7.22,59.51) ; v2(7.21,19.34) 7.27,19.28 J3.7 ; U7.M1 34.63,51.49 v2(33.8,50.67) ; U1.C3 45.79,28.45 45.68,28.56 45.68,28.58 45.36,28.91 45.36,29.15 45.14,29.37 45.12,29.37 44.99,29.49 U1.A2 ; C3.2 41.21,32.69 40.67,32.14 39.28,32.14 v2(39.26,32.13) ; v2(7.22,57.05) 7.23,57.05 J1.13 ; J3.43 7.27,26.48 v2(7.21,26.53) ; v2(39.26,32.13) 39.26,32.98 Y1.4 ; v2(39.26,32.13) 38.79,31.66 v2(38.79,31.49) 38.53,31.74 C2.2 ; J1.31 7.32,60.65 v2(7.22,60.74) ; Y1.2 36.12,35.11 v2(35.86,35.36) ; v2(7.22,64.28) 7.26,64.25 J1.49 ; U7.M11 41.13,51.23 41.5,50.85 41.98,50.85 v1(42.04,50.79) ; v2(7.22,65.52) 7.3,65.45 J1.55 ; J3.1 7.23,18.03 v2(7.21,18.01) ; C70.2 59.15,47.03 v2(58.6,47.57) ; v1(42.19,51.53) 42.11,51.53 42.1,51.54 U7.M12 ; J3.13 7.22,20.48 v2(7.21,20.47) ; J2.25 7.18,41.29 v2(7.18,41.3) ; J1.43 7.27,63.05 v2(7.22,63.01) ; v2(7.21,21.71) 7.25,21.68 J3.19 ; J3.55 7.23,28.88 v2(7.21,28.86) ; Y2.4 v2(61.2,43.61) ; J2.19 7.21,40.09 v2(7.18,40.12) ; J2.13 7.18,38.89 v2(7.18,38.89) ; v2(56.03,45.31) 56.03,45.31 Y2.2 ; v2(7.18,36.44) 7.18,36.44 J2.1 ; U7.A1 34.2,58.69 33.76,59.13 ; v2(41.53,59.64) 41.78,59.39 U7.A12 ; J1.7 v2(7.22,55.85)
  TOP w0.165: v2(88.87,47.37) 88.93,47.32 U8.2 ; v1(38.88,55.1) 38.54,55.44 U7.F7 ; v1(38.88,55.1) 38.84,55.1 U7.G7 ; v1(38.88,55.1) 38.94,55.04 38.94,55.03 U7.G8 ; C93.2 74.17,44.91 v2(74.21,44.95) ; U7.G4 v1(36.25,54.47) U7.G3 36.2,55.07 36.22,55.09 v1(36.24,55.09) ; U7.G4 36.28,55.09 v1(36.24,55.09) ; U7.G4 36.83,55.05 v1(36.83,55.12) ; U7.G4 v1(36.9,54.47) U7.G5 ; v1(37.56,55.15) 37.59,55.15 U7.F6 ; v1(37.56,55.15) 37.27,55.44 U7.F5 ; v1(37.56,55.15) 37.56,55.13 ; U1.E5 v3(47.79,26.2) ; U1.E5 v3(47.79,27) U1.E6 v3(47.79,26.2) ; U1.E5 v3(46.99,26.2) U1.F5 ; U1.E5 v3(46.99,27) ; v3(47.79,26.2) U1.F6 ; v3(47.79,26.2) U1.F5 ; v1(38.22,55.14) U7.G6 ; v1(38.22,55.14) 38.22,55.1 U7.G7 ; v1(38.22,55.14) U7.F7 ; v1(38.22,55.14) 37.92,55.44 U7.F6 ; U7.G6 v1(37.55,54.47) ; U7.G6 37.56,55.11 37.56,55.13 ; U1.G7 v3(48.6,25.39) ; v3(48.6,25.39) U1.F6 ; v3(48.6,25.39) 48.22,25 U1.G6 47.78,25.41 ; 36.58,55.42 v1(36.24,55.09) ; 36.58,55.42 U7.F4 36.37,55.65 v1(36.37,55.65) ; 36.58,55.42 36.58,55.37 v1(36.83,55.12) ; v3(47.8,25.41) U1.F6 ; v3(47.8,25.41) 47.78,25.41 ; v3(47.8,25.41) U1.G5 ; v1(37.57,55.75) U7.E5 37.55,56.41 v1(37.69,56.41) ; v1(37.57,55.75) 37.53,55.75 U7.F5 ; v1(37.57,55.75) 37.88,56.05 U7.E6 ; v1(37.57,55.75) U7.F6 ; v1(36.83,55.12) 36.9,55.12 ; 37.56,55.13 U7.G5 ; U7.G5 36.9,55.12 ; U7.G5 v1(37.55,54.47) ; R108.2 71.55,39.19 C91.2 70.73,39.18 v2(70.69,39.14) 70.07,39.14 v2(70.05,39.17) ; U7.E6 38.16,55.81 38.18,55.79 v1(38.19,55.79) ; U7.E6 37.69,56.28 v1(37.69,56.41) ; U7.F6 38.19,55.75 38.19,55.78 ; 47.78,25.41 U1.F5 ; U7.G7 v1(38.85,54.47) ; U7.F5 36.9,55.12 ; v1(38.19,55.79) 38.48,56.09 U7.E7 38.81,55.81 38.81,55.8 v1(38.83,55.79) 38.83,55.74 U7.F7 ; v1(38.19,55.79) 38.19,55.78 ; C55.1 78.21,14.19 v2(78.8,13.61) ; C67.1 98.55,17.02 v2(98.49,17.07) ; U7.K10 v1(40.8,52.52) U7.L10 ; U7.C6 37.57,57.7 v1(37.57,57.73) ; v1(37.55,54.47) U7.H6 v1(37.55,53.82) ; U1.J6 v3(47.79,23) ; U7.D7 38.17,56.39 38.03,56.39 38.03,56.38 37.79,56.38 37.79,56.39 37.72,56.39 v1(37.69,56.41) ; v1(35.63,57.05) 35.78,56.9 35.78,56.89 U7.D3 ; U1.J5 v3(46.99,23) ; U7.C4 36.24,57.05 v1(36.22,57.05) ; v2(98.89,15.1) 99.09,15.29 X1.4 ; v2(79.4,33.09) 79.36,33.12 79.36,33.68 79.52,33.84 U2.5 ; U7.K6 v1(37.55,52.52) ; U7.K6 U7.K5 36.98,52.6 36.98,52.58 36.96,52.55 v1(36.93,52.55) ; U7.K6 U7.K7 ; U7.F7 38.19,55.78 ; 103.04,16.2 102.98,16.25 v2(102.98,16.28) 102.98,16.97 C68.1 ; U1.J7 v3(49.39,23) ; U1.J8 v3(50.19,23) ; U7.D6 37.57,57.05 v1(37.57,57.12) ; C90.2 v2(76.04,42.03) ; C92.2 v2(74.25,43.84) ; U1.G8 v3(49.43,25.36)
  TOP w0.203: v2(43.28,68.7) 43.13,68.55 C72.2 ; v2(92.02,20.65) 92.07,20.7 C62.1 C63.1 ; v2(60.22,10.97) 60.07,11.13 ESD1.3 ; v2(52.74,35.31) 52.87,35.18 R73.2 ; ESD10.3 84.07,60.73 v2(84.18,60.83) ; v2(105.07,14.28) 104.97,14.38 C66.1 ; v2(61.03,6.53) 61.02,6.54 J4.2 ; C64.1 99.69,33.49 v2(99.63,33.55) ; v2(77.31,60.38) 77.09,60.16 ESD8.3 ; v2(56.55,6.61) 56.52,6.64 J4.11 ; C69.1 65.77,65.28 v2(65.81,65.32) ; v2(4,61.86) 4.01,61.85 J1.38 ; U1.B4 U1.C3 ; v2(4.26,17.93) 4.81,18.48 J3.4 ; ESD10.8 84.07,58.42 v2(84.45,58.04) ; v2(43.33,69.49) 43.33,69.49 R105.2 ; v2(53.53,11.32) 53.59,11.39 ESD6.3 ; 86.56,56.32 C101.2 85.98,56.32 R118.1 ; 86.56,56.32 86.67,56.32 v2(86.99,56.64) ; 86.56,56.32 v2(86.99,55.88) ; v2(80.44,60.32) 80.52,60.24 ESD9.3 ; v2(99.89,54.21) 99.95,54.15 C7.2 ; v2(102.72,21.08) 102.87,20.93 U6.8 ; ESD3.8 56.77,13.11 v2(56.88,13.22) ; R77.1 103,57.17 v2(103.04,57.21) ; J3.20 4.32,21.68 v2(4.3,21.7) ; v2(100.72,33.55) 100.71,33.54 C65.1 ; v2(102.29,42.74) 102.23,42.68 U5.2 ; C61.1 111.9,26.54 v2(111.97,26.62) ; C100.2 55.32,69.67 v2(55.35,69.71) ; C4.2 53.04,33.15 v2(52.66,32.77) ; v2(46.74,67.71) 46.58,67.55 R102.1 ; v2(59.49,10.29) 59.52,10.26 J4.5 ; v2(4,58.31) 4.05,58.25 J1.20 ; C59.2 106.48,40.96 v2(106.6,41.08) ; v2(57.12,10.83) 56.77,11.18 ESD3.3 ; v2(30.04,13.88) 30.04,12.88 ESD4.8 ; v2(57.92,6.57) 58.02,6.67 J4.8 ; C5.2 105.28,59.64 v2(105.24,59.68) ; X1.2 102.36,12.17 v2(102.46,12.08) ; v2(101.62,55.18) 101.35,54.9 C6.2 ; C56.2 81.28,13.72 v2(80.49,13.72) ; J2.26 4.04,41.29 v2(4,41.33) ; C99.2 v2(52.18,64.45) ; v2(41.2,9.51) 41.17,9.53 ESD5.2 ; v2(4.46,46.93) 4.49,46.89 J2.54 ; ESD1.8 60.07,13.07 v2(60.25,13.25) ; v2(80.49,58.14) 80.52,58.17 ESD9.8 ; R104.2 42.65,67.93 v2(43.26,67.93) ; v2(4,59.52) 4.06,59.45 J1.26 ; v2(33.68,13.79) 33.68,12.85 ESD2.8 ; v2(105.31,42.84) 105.26,42.8 C57.2 ; J1.54 4.05,65.05 v2(4,65.11) ; C98.2 59.18,67.56 v2(59.35,67.39) ; J2.38 4.49,43.69 v2(4.47,43.71) ; J3.26 v2(4.29,22.88) ; U6.47 96.39,21.87 v2(96.32,21.93) ; ESD7.3 26.42,11.52 v2(26.42,11.51) ; R89.1 78.25,18.94 v2(78.05,19.14) ; ESD8.8 77.09,57.86 v2(77.01,57.78) ; J5.5 32.6,10.1 v2(32.58,10.12) ; R94.2 89.33,24.13 v2(89.31,24.16) ; J1.4 4.59,55.05 v2(4.58,55.06) ; v2(4.08,36.94) 4.13,36.89 J2.4 ; v2(80.41,19.12) 80.48,19.12 80.73,18.88 C54.2 ; ESD6.8 53.59,13.52 v2(53.52,13.6) ; R68.2 v2(17.83,12.7) ; v2(4.3,25.28) 4.3,25.28 J3.38 ; v2(100.23,30.09) 99.85,29.71 U6.35 ; U6.23 104.6,26.39 v2(104.58,26.37) ; ESD4.3 30.1,11.25 v2(30.18,11.17) ; v2(4.3,20.45) 4.32,20.48 J3.14 ; C58.2 98.53,35.88 v2(98.51,35.87) ; v2(26.42,13.44) ESD7.8 ; J2.20 3.99,40.09 v2(3.95,40.13) ; ESD2.3 33.65,11.24 v2(33.43,11.02) ; v2(53.36,6.7) 53.52,6.86 J4.17 ; C60.1 110.84,25.63 v2(111.96,25.63) ; v2(74.96,4.77) 75.22,4.52 J11.10 ; v2(97.08,34.39) 96.69,34 LED2.2 ; v2(4.3,28.46) 4.31,28.48 J3.54 ; J1.14 4,57.05 v2(4,57.05) ; D2.1 v2(97.54,59.64)
  TOP w0.254: U1.K1 43.31,22.6 v2(43.19,22.47) ; U1.F2 U1.F1 ; U1.B6 U1.A6 ; U1.A4 U1.B4
  POWER w0.203: v2(54.04,20.3) 54.64,20.3 v2(54.76,20.42)
  BOTTOM w0.127: C29.2 C34.2 ; C29.2 C28.2 C18.2 C19.2 C20.2 43.75,21.95 C14.2 ; C29.2 43.74,25.59 C27.2 ; C31.2 54.04,26.39 C30.2 54.32,24.94 C35.2 54.3,24.25 C36.2 ; C22.2 C8.2 50.54,20.33 C13.2 C12.1 C11.2 C9.2 C10.2 ; 38.94,59.16 38.35,58.57 38.35,58.08 C88.2 ; C85.2 34.07,58.34 C84.2 34.12,57.45 C83.2
  BOTTOM w0.165: v2(102.98,16.28) 102.98,16.3 102.97,16.31 ; C89.2 38.94,59.16 ; v1(40.76,53.85) 41.04,54.14 C81.2 ; C88.2 38.07,57.93
  BOTTOM w0.203: C87.2 34.12,54.7 33.02,55.8 v2(30.35,55.8) ; C22.2 54.01,20.33 v2(54.04,20.3) ; C81.2 41.67,53.85 C82.2 ; v3(47.79,27) 47.94,27.15 C15.2 C32.2 47.83,26.24 v3(47.79,26.2) ; C24.2 48.21,31.02 v2(48.07,31.16) ; C77.2 40.82,50.3 41.71,50.3 42.04,50.63 v1(42.04,50.79) ; C16.2 49.87,30.12 v2(50.64,30.88) ; C85.2 33.83,59.08 v2(32.74,60.17) 36.02,60.17 36.22,59.97 C76.2 36.98,59.17 C86.2 ; C21.2 45.82,30.71 v2(46.25,31.14) 46.63,30.75 C26.2 ; C31.2 55.29,27.1 v2(55.46,26.93) 56.28,26.93 v2(56.29,26.92) v2(57.2,26.92) ; C18.2 43.13,23.75 v2(43.06,23.82) ; C27.2 40.87,25.59 v2(40.29,26.17) ; v1(37.57,57.73) 38,57.73 C88.2 ; C19.2 43.67,22.96 v2(43.19,22.47)
  BOTTOM w0.254: C37.2 C38.2 C39.2 C40.2 C41.2 ; C17.2 42.99,29.28 v2(41.43,30.84) ; C21.2 C26.2 C25.2 C24.2 C23.2 C16.2 ; C33.2 C34.2 ; v2(41.53,59.64) 41.53,59.65 v2(42.43,60.55)
  vias: v2(0.6,66.94) v2(0.6,62.19) v2(0.6,57.43) v2(0.6,52.68) v2(0.6,47.92) v2(0.6,43.17) v2(0.6,38.41) v2(0.6,33.66) v2(0.73,15.55) v2(0.73,10.89) v2(0.73,6.23) v2(5.03,71.63) v2(5.03,0.87) v2(5.59,10.79) v2(5.59,9.52) v2(5.59,8.25) v2(5.59,6.98) v2(6.86,10.79) v2(6.86,9.52) v2(6.86,8.25) v2(6.86,6.98) v2(8.13,10.79) v2(8.13,9.52) v2(8.13,8.25) v2(8.13,6.98) v2(9.06,53.7) v2(9.25,71.63) v2(9.4,10.79) v2(9.4,9.52) v2(9.4,8.25) v2(9.4,6.98) v2(10.32,62.02) v2(10.36,24.21) v2(10.6,58.94) v2(10.67,10.79) v2(10.67,9.52) v2(10.67,8.25) v2(10.67,6.98) v2(11.47,0.87) v2(11.73,57.3) v2(11.94,10.79) v2(11.94,9.52) v2(11.94,8.25) v2(11.94,6.98) v2(13.21,10.79) v2(13.21,9.52) v2(13.21,8.25) v2(13.21,6.98) v2(13.46,71.63) v2(13.55,57.13) v2(13.65,51.72) v2(14.48,10.79) v2(14.48,9.52) v2(14.48,8.25) v2(14.48,6.98) v2(14.78,43.29) v2(14.8,42.37) v2(14.92,51.72) v2(15.25,59.07) v2(15.39,54.35) v2(15.67,25.61) v2(15.84,60.46) v2(16.19,51.72) v2(16.34,64.46) v2(16.35,41.39) v2(16.9,62.07) v2(16.95,34.75) v2(17.31,42.37) v2(17.46,51.72) v2(17.67,71.63) v2(17.91,0.87) v2(18.22,34.75) v2(18.73,51.72) v2(19.49,34.75) v2(19.88,58.7) v2(20,51.72) v2(20.56,55.9) v2(20.76,34.75) v2(21.11,8.33) v2(21.27,51.72) v2(21.89,71.63) v2(22.03,34.75) v2(22.54,51.72) v2(23.13,59) v2(23.3,34.75) v2(24.35,0.87) v2(24.5,64.44) v2(24.59,61.92) v2(24.57,34.75) v2(24.72,6.67) v2(25.84,34.75) v2(26.1,71.63) v2(26.37,27.44) v2(27.9,58.76) v2(27.99,55.52) v2(28.27,63.32) v2(28.7,55.5) v2(29.08,54.94) v2(29.24,60.44) v2(29.51,55.52) v2(29.68,53.16) v2(29.83,6.64) v2(30.01,52.59) v2(30.1,62.02) v2(30.22,60.45) v2(30.2,58.83) v2(30.31,71.63) v2(30.43,63.57) v2(30.79,0.87) v2(31.1,6.67) v2(31.79,63.53) v2(32.71,61.96) v2(33.55,40.85) v2(34.02,63.16) v2(34.2,39.2) v2(34.22,6.63) v2(34.53,71.63) v2(37.43,64.36) v2(37.56,65.1) v2(38.74,71.63) v2(38.98,0.85) v2(39.32,8.14) v2(39.84,62.99) v2(39.86,65.16) v2(41.66,65.16) v2(41.7,62.99) v2(42.95,71.63) v2(43.66,0.87) v2(44.11,14.89) v2(44.12,13.83) v2(46.15,37.58) v2(47.17,71.63) v2(47.92,36.38) v2(49.47,35.35) v2(49.48,34.29) v2(50.1,0.87) v2(51.13,6.27) v2(51.38,71.63) v2(51.46,36.4) v2(52.47,19.09) v2(55,59.5) v2(55.14,60.44) v2(55.07,55.46) v2(55.59,71.63) v2(56.54,0.87) v2(56.7,67.45) v2(57.2,56.61) v2(57.4,55.43) v2(57.56,60.32) v2(57.66,58.65) v2(58.36,56.61) v2(59.81,71.63) v2(62.85,7.94) v2(62.98,0.87) v2(64.02,71.63) v2(68.23,71.63) v2(68.18,40.25) v2(69.41,0.87) v2(69.71,62.26) v2(69.93,58.8) v2(70.92,56.08) v2(71.19,62.31) v2(71.47,69.62) v2(71.82,53.9) v2(72.09,60.03) v2(72.45,71.63) v2(73.4,55.96) v2(74.07,53.8) v2(76.24,18.69) v2(76.42,0.78) v2(76.66,71.63) v2(76.69,65.18) v2(78.14,61.37) v2(78.17,37.27) v2(78.99,37.26) v2(79.15,35.59) v2(79.57,32.36) v2(79.71,65.29) v2(79.82,17.13) v2(79.91,37.26) v2(80.43,5.84) v2(80.87,71.63) v2(81.25,65.23) v2(82.74,0.78) v2(83.74,37.85) v2(85.09,71.63) v2(85.91,34.02) v2(86.39,15.65) v2(86.79,48.29) v2(87.35,0.76) v2(87.82,43.79) v2(88.7,49.25) v2(89,45.16) v2(89.3,71.63) v2(89.51,49.27) v2(89.61,43.81) v2(90.11,69.83) v2(90.09,63.13) v2(93.51,71.63) v2(93.81,10.18) v2(94.58,67.43) v2(94.58,66.16) v2(94.58,64.89) v2(95.08,10.18) v2(95.17,0.87) v2(95.85,67.43) v2(95.85,66.16) v2(95.85,64.89) v2(96.35,10.18) v2(96.81,4.16) v2(97.12,67.43) v2(97.12,66.16) v2(97.12,64.89) v2(97.62,10.18) v2(97.73,71.63) v2(98.39,67.43) v2(98.39,66.16) v2(98.39,64.89) v2(98.89,10.18) v2(99.66,67.43) v2(99.66,66.16) v2(99.66,64.89) v2(100.16,10.18) v2(100.93,67.43) v2(100.93,66.16) v2(100.93,64.89) v2(101.43,10.18) v2(101.6,0.87) v2(101.94,71.63) v2(102.2,67.43) v2(102.2,66.16) v2(102.2,64.89) v2(102.7,10.18) v2(103.47,67.43) v2(103.47,66.16) v2(103.47,64.89) v2(104.74,67.43) v2(104.74,66.16) v2(104.74,64.89) v2(106.01,67.43) v2(106.01,66.16) v2(106.01,64.89) v2(106.15,71.63) v2(107.28,67.43) v2(107.28,66.16) v2(107.28,64.89) v2(108.04,0.87) v2(108.55,67.43) v2(108.55,66.16) v2(108.55,64.89) v2(109.82,67.43) v2(109.82,66.16) v2(109.82,64.89) v2(110.32,71.63) v2(110.69,61.93) v2(111.09,67.43) v2(111.09,66.16) v2(111.09,64.89) v2(112.36,67.43) v2(112.36,66.16) v2(112.36,64.89) v2(114.22,49.07) v2(114.51,71.63) v2(114.48,0.87) v2(119.02,67.12) v2(119.02,62.02) v2(119.02,56.91) v2(119.02,51.8) v2(119.02,46.7) v2(119.02,41.59) v2(119.28,8.24)
